# Altium PCB bme_affect_sen_brd.PcbDoc
Units mm, origin at the board's own origin, x right, y up, seen from the top; angles counter-clockwise.
Board outline 50 x 34 mm, 6 copper layers (L1_SIG/PWR, GND_P1, L3_SIG/PWR, L4_SIG/GND, GND_P2, L6_SIG/PWR), stack 0.816 mm thick; 116 components, 81 nets, 374 pads, 130 vias.
Unrouted connection lines stored in the file: 6.
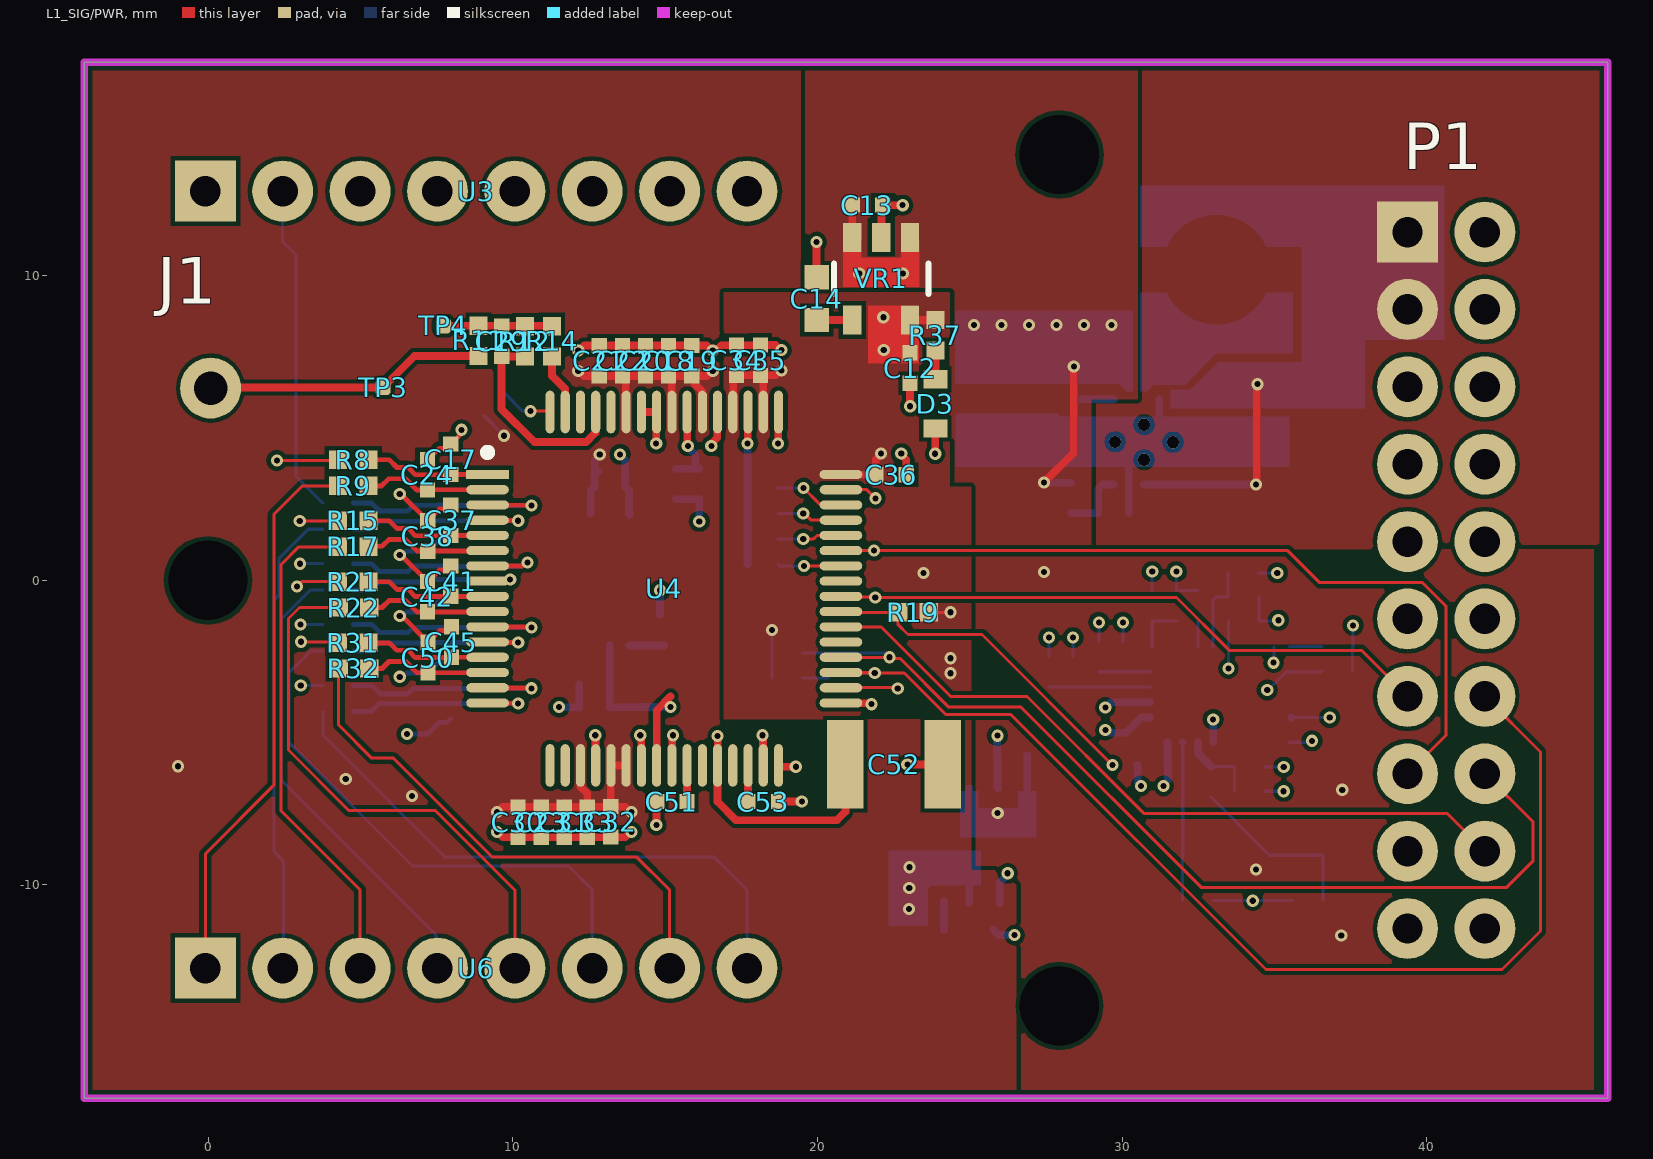
[diagram p0: L1_SIG/PWR view]
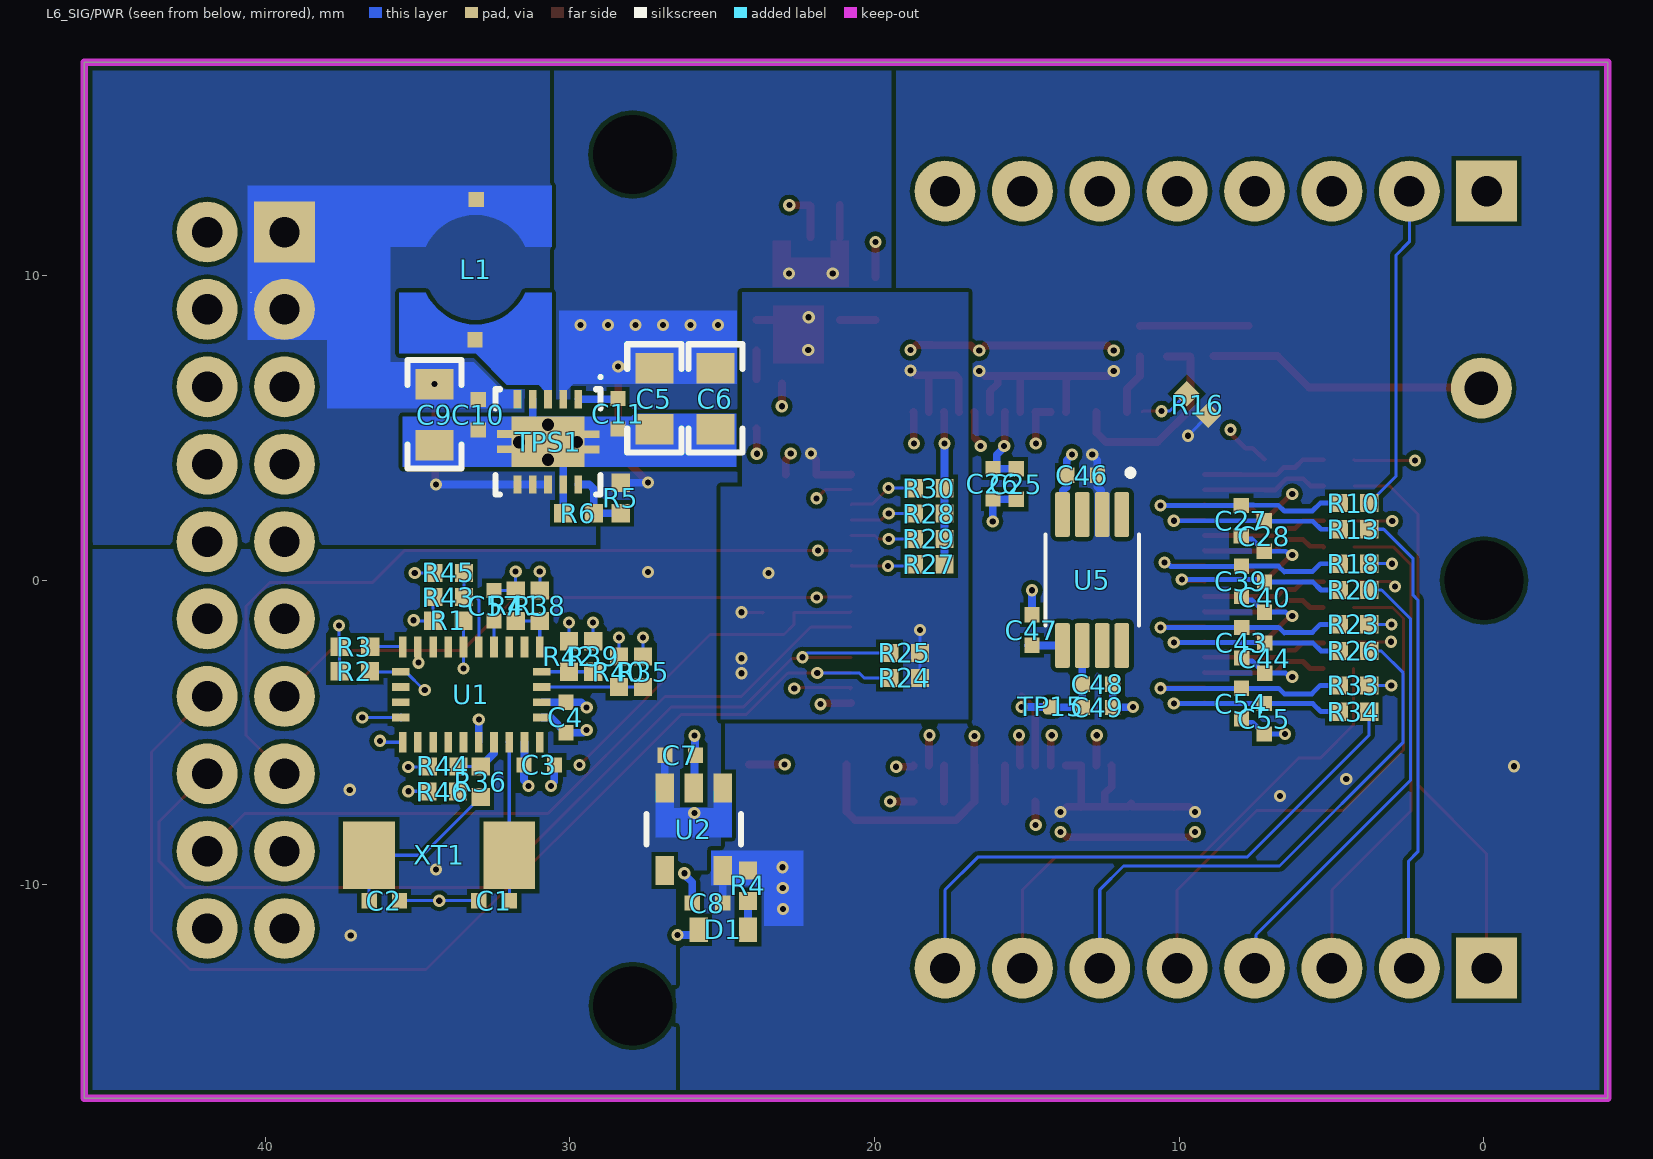
[diagram p1: L6_SIG/PWR view, seen from below]
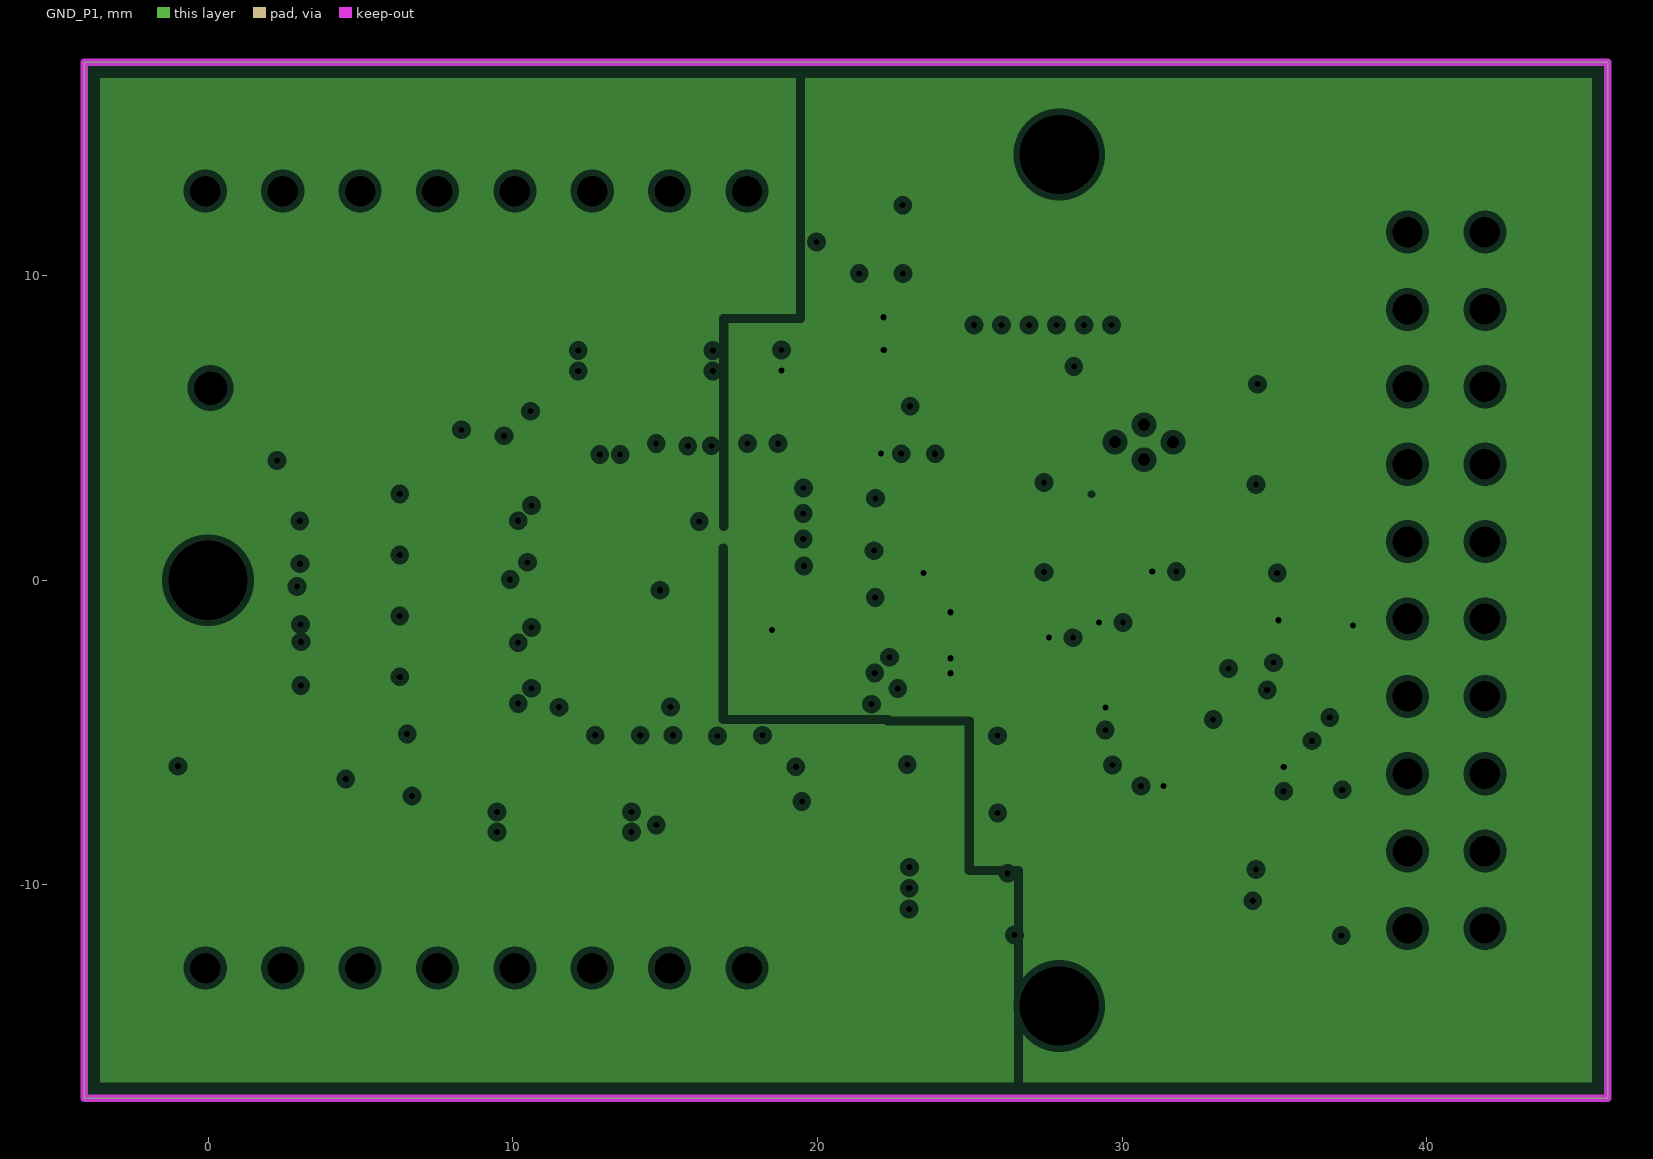
[diagram p2: GND_P1, clearances drawn from the general rule]
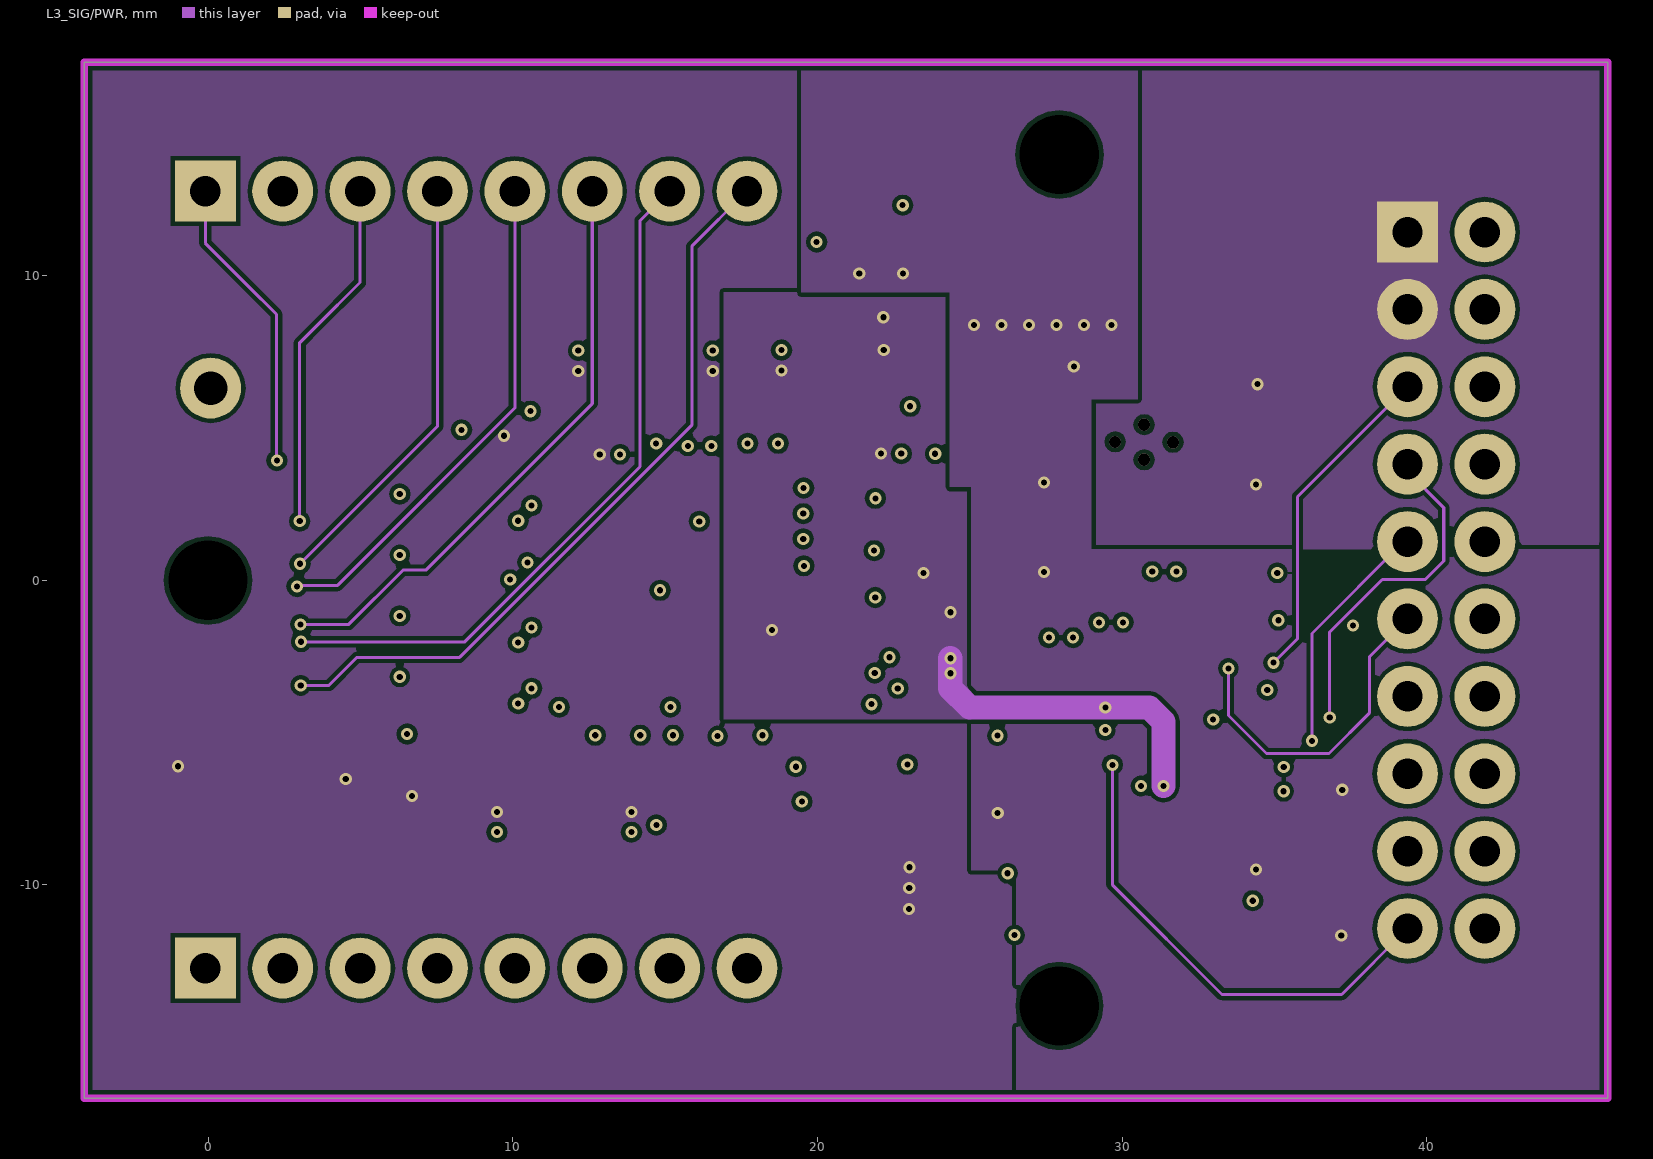
[diagram p3: L3_SIG/PWR]
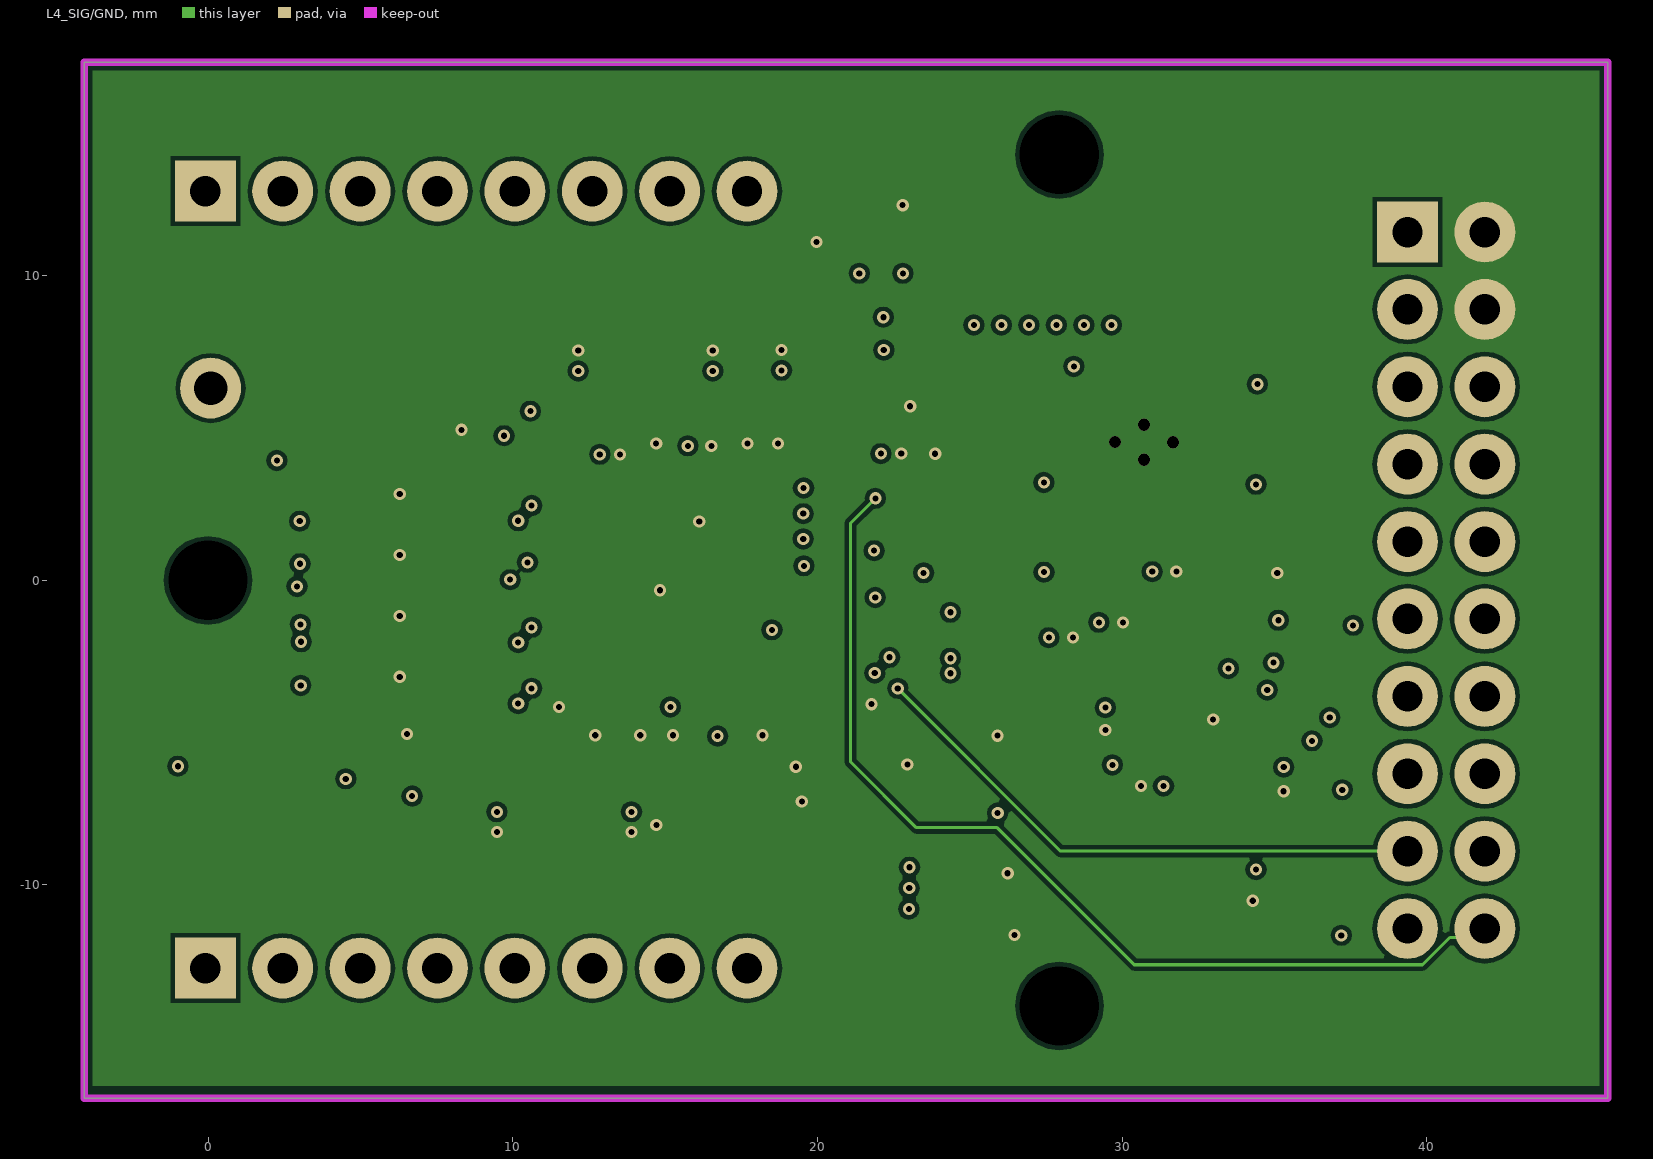
[diagram p4: L4_SIG/GND]
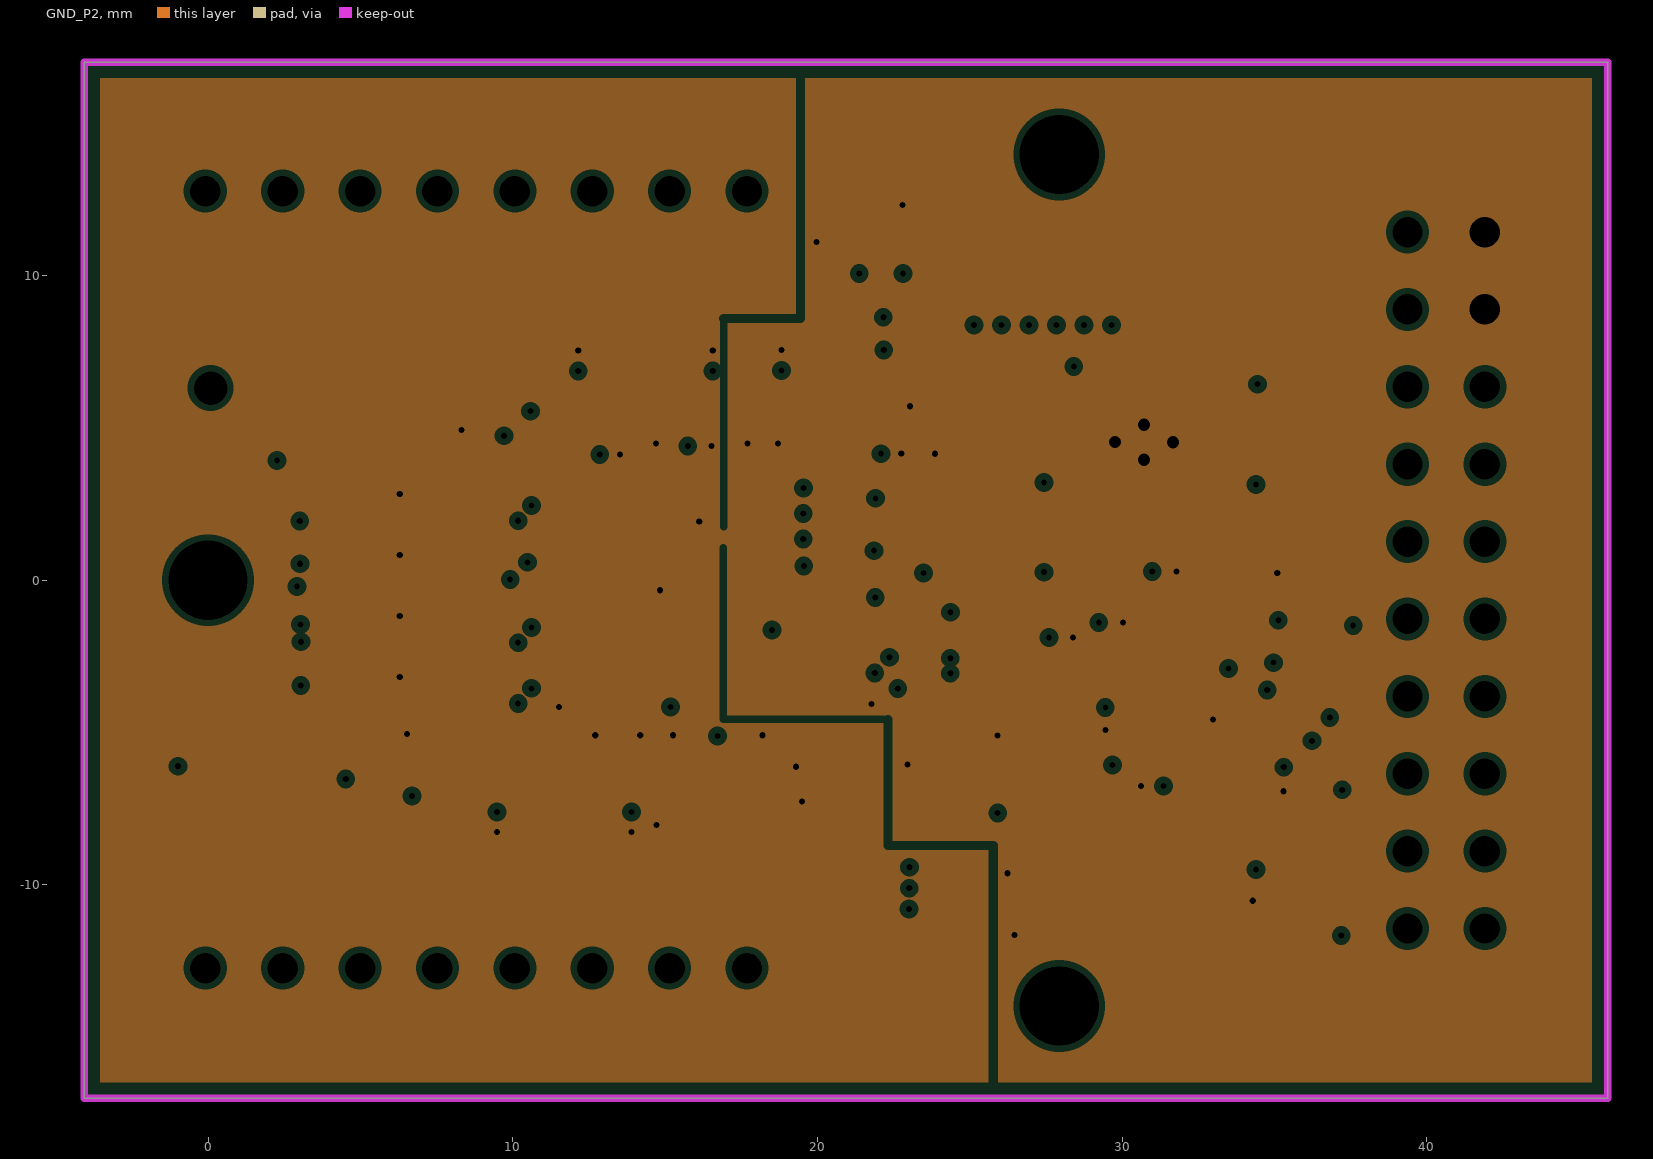
[diagram p5: GND_P2, clearances drawn from the general rule]
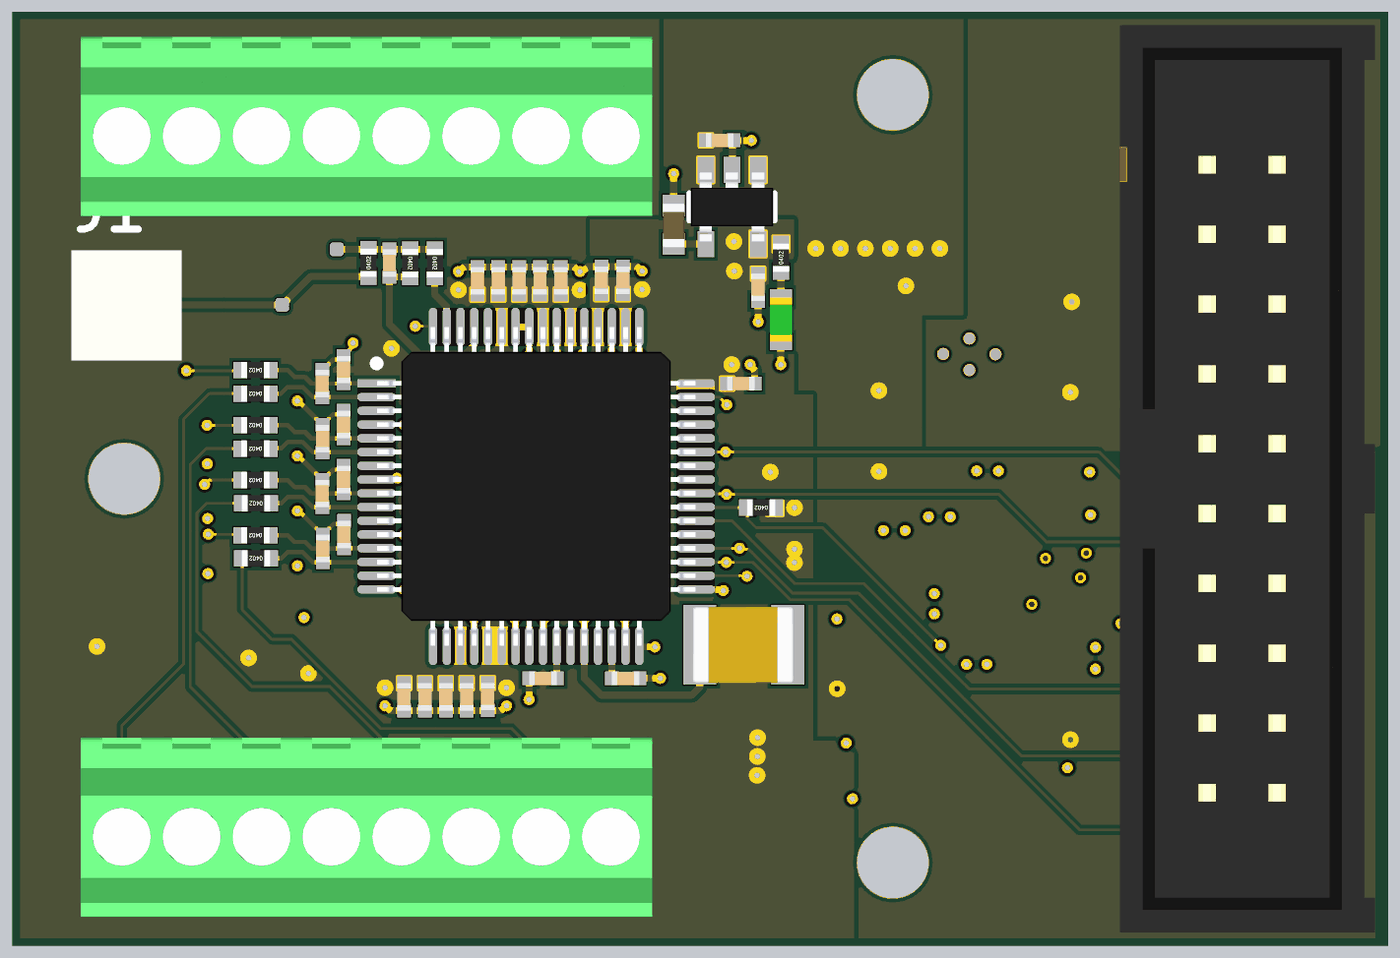
[diagram p6: 3D render of the assembled board from above, using the file's embedded part models]
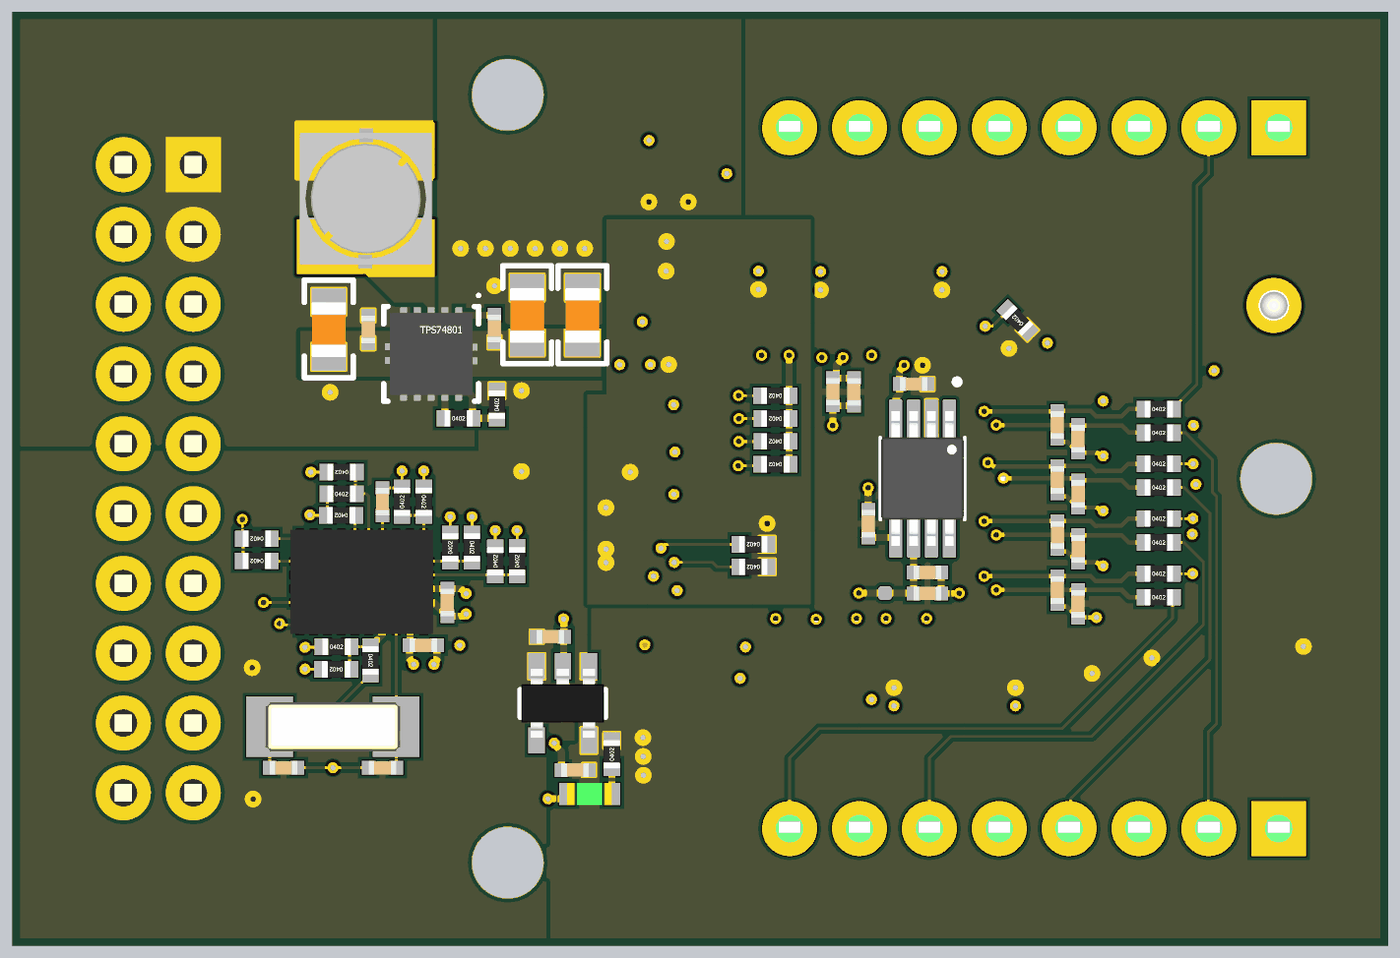
[diagram p7: 3D render of the assembled board from below, using the file's embedded part models]

## Layer stack, top to bottom
Top Solder: solder mask 0.01, Solder Resist, Dk 3.5
L1_SIG/PWR: signal copper 0.036
Dielectric 2: prepreg 0.071, PP-006, Dk 4.1
GND_P1: plane copper 0.035, net 3V3
Dielectric 4: prepreg 0.071, PP-006, Dk 4.1
L3_SIG/PWR: signal copper 0.035
Dielectric 1: dielectric 0.32, FR-4, Dk 4.8
L4_SIG/GND: signal copper 0.035
Dielectric 5: prepreg 0.071, PP-006, Dk 4.1
GND_P2: plane copper 0.035, net GND
Dielectric 3: prepreg 0.071, PP-006, Dk 4.1
L6_SIG/PWR: signal copper 0.036
Bottom Solder: solder mask 0.01, Solder Resist, Dk 3.5

## Board outline
-4.06,-17 45.94,-17 45.94,17 -4.06,17

## Design rules (kind name [scope] priority, off if disabled: settings)
Clearance [All] p1: gap=0.14 ignorepadtopadclearanceinfootprint=FALSE except(0.1: Arc-SMDPad Track-SMDPad; 0.127: SMDPad-SMDPad)
ComponentClearance [All] p1: gap=0.01 collisioncheckmode=3 verticalgap=0.254 showdistances=FALSE
PlaneClearance [All] p1: clearance=0.208
PlaneConnect [All] p1: planeconnectstyle=Direct reliefexpansion=0.508 reliefentries=4 reliefconductorwidth=0.254 reliefairgap=0.254
PolygonConnect [All] p1: connectstyle=Direct reliefconductorwidth=0.254 reliefentries=4 polygonreliefangle="90 Angle" airgapwidth=0.254
RoutingVias [All] p1: holewidth=0.2 width=0.4 viastyle="Through Hole" minholewidth=0.2 minwidth=0.4 maxholewidth=0.2 maxwidth=0.4
SolderMaskExpansion [All] p1: expansion=0.102 istentingtop=FALSE
Width [All] p1: maxlimit=0.8 minlimit=0.1 preferedwidth=0.254
27 further rules are at their usual default settings.

## Classes and differential pairs
component class U_pwr_sen_brd: C5 C6 C7 C8 C9 C10 C11 C12 C13 C14 D1 D3 L1 R4 R5 R6 R37 TPS1 U2 VR1
component class U_bno08x_module: C1 C2 C3 C4 C57 R1 R2 R3 R35 R36 R38 R39 R40 R41 R42 R43 R44 R45 R46 U1 XT1
component class U_ads1299: C17 C18 C19 C20 C21 C22 C23 C24 C25 C26 C27 C28 C29 C30 C31 C32 C33 C34 C35 C36 C37 C38 C39 C40 C41 C42 C43 C44 C45 C46 C47 C48 C49 C50 C51 C52 C53 C54 C55 J1 R8 R9 R10 R11 R12 R13 R14 R15 R16 R17 R18 R19 R20 R21 R22 R23 R24 R25 R26 R27 R28 R29 R30 R31 R32 R33 R34 TP3 TP4 TP15 U3 U4 U5 U6
component class bme_affect_sen_brd: P1

## Components (designator, comment, footprint, x,y, rotation, side; value= is the part's Value field where it differs from the comment)
C1 "0402 capacitor" "0402 CAP" 32.492,-10.518 r0 bottom value=0
C2 "0402 capacitor" "0402 CAP" 36.092,-10.518 r180 bottom value=0
C3 "0402 capacitor" "0402 CAP" 31.007,-6.061 r180 bottom value=0
C4 "0402 capacitor" "0402 CAP" 30.134,-4.502 r270 bottom value=0
C5 "0805, capacitor" "0805, cap" 27.231,4.953 r90 bottom value=10u
C6 "0805, capacitor" "0805, cap" 25.225,4.953 r90 bottom value=10u
C7 "0603, capacitor" "0402 CAP" 26.383,-5.745 r180 bottom value=0
C8 "0603, capacitor" "0402 CAP" 25.487,-10.595 r0 bottom value=0
C9 "0805, capacitor" "0805, cap" 34.444,4.436 r90 bottom value=10u
C10 "0603, capacitor" "0402 CAP" 33.009,5.434 r270 bottom value=0
C11 "0603, capacitor" "0402 CAP" 28.42,5.468 r270 bottom value=0
C12 "0603, capacitor" "0402 CAP" 23.041,6.966 r270 top value=2.2u
C13 "0603, capacitor" "0402 CAP" 21.643,12.314 r0 top value=100n
C14 "0603, capacitor" "0603 cap" 19.977,9.243 r90 top value=10n
C17 "0603, capacitor" "0402 CAP" 7.969,3.972 r90 top value=0
C18 "0603, capacitor" "0402 CAP" 15.114,7.204 r90 top value=100n
C19 "0603, capacitor" "0402 CAP" 15.874,7.204 r90 top value=1u
C20 "0603, capacitor" "0402 CAP" 14.358,7.204 r90 top value=100n
C21 "0603, capacitor" "0402 CAP" 12.843,7.204 r90 top value=1u
C22 "0603, capacitor" "0402 CAP" 13.601,7.204 r90 top value=100n
C23 "0603, capacitor" "0402 CAP" 10.935,-7.938 r270 top value=1u
C24 "0603, capacitor" "0402 CAP" 7.2,3.463 r90 top value=0
C25 "0603, capacitor" "0402 CAP" 15.356,3.159 r270 bottom value=1u
C26 "0603, capacitor" "0402 CAP" 16.118,3.167 r270 bottom value=100n
C27 "0603, capacitor" "0402 CAP" 7.966,1.953 r270 bottom value=0
C28 "0603, capacitor" "0402 CAP" 7.21,1.453 r270 bottom value=0
C29 "0603, capacitor" "0402 CAP" 9.641,7.85 r270 top value=0
C30 "0603, capacitor" "0402 CAP" 10.174,-7.938 r270 top value=100n
C31 "0603, capacitor" "0402 CAP" 11.691,-7.938 r270 top value=1u
C32 "0603, capacitor" "0402 CAP" 13.215,-7.928 r270 top value=100n
C33 "0603, capacitor" "0402 CAP" 12.447,-7.938 r270 top value=1u
C34 "0603, capacitor" "0402 CAP" 17.345,7.223 r90 top value=0
C35 "0603, capacitor" "0402 CAP" 18.131,7.223 r90 top value=0
C36 "0603, capacitor" "0402 CAP" 22.42,3.463 r0 top value=0
C37 "0603, capacitor" "0402 CAP" 7.969,1.972 r90 top value=0
C38 "0603, capacitor" "0402 CAP" 7.21,1.453 r90 top value=0
C39 "0603, capacitor" "0402 CAP" 7.96,-0.037 r270 bottom value=0
C40 "0603, capacitor" "0402 CAP" 7.204,-0.553 r270 bottom value=0
C41 "0603, capacitor" "0402 CAP" 7.969,-0.028 r90 top value=0
C42 "0603, capacitor" "0402 CAP" 7.2,-0.537 r90 top value=0
C43 "0603, capacitor" "0402 CAP" 7.95,-2.047 r270 bottom value=0
C44 "0603, capacitor" "0402 CAP" 7.198,-2.555 r270 bottom value=0
C45 "0603, capacitor" "0402 CAP" 7.989,-2.028 r90 top value=0
C46 "0603, capacitor" "0402 CAP" 13.185,3.446 r0 bottom value=4.7u
C47 "0603, capacitor" "0402 CAP" 14.836,-1.634 r90 bottom value=100n
C48 "0603, capacitor" "0402 CAP" 12.685,-3.412 r180 bottom value=1u
C49 "0603, capacitor" "0402 CAP" 12.685,-4.174 r180 bottom value=10u
C50 "0603, capacitor" "0402 CAP" 7.22,-2.537 r90 top value=0
C51 "0603, capacitor" "0402 CAP" 15.225,-7.263 r180 top value=1u
C52 "1210, capacitor" "1210, cap" 22.521,-6.044 r0 top value=100u
C53 "0603, capacitor" "0402 CAP" 18.225,-7.263 r0 top value=1u
C54 "0603, capacitor" "0402 CAP" 7.96,-4.047 r270 bottom value=0
C55 "0603, capacitor" "0402 CAP" 7.21,-4.547 r270 bottom value=0
C57 "0402 capacitor" "0402 CAP" 32.492,-0.839 r90 bottom value=0
D1 "0603, LED" "0603 LED" 24.086,-11.464 r0 bottom
D3 "0603, LED" "0603 LED" 23.871,6.666 r270 top
J1 "1x1 Mini binding post" 1_pin_binding_post 0.086,6.308 r90 top value="1x3 Pin Header"
L1 "Coil, SRR4028" SRR4028 33.099,10.196 r0 bottom locked value=2.2u
P1 "2x10 Ribbon Header" 2x10_RIBBON_CABLE_CON 40.64,0 r0 top locked value="1x10 Pin Header"
R1 "0402, resistor" "0402 res" 33.992,-1.332 r180 bottom value=0
R2 "0402, resistor" "0402 res" 37.061,-2.986 r180 bottom value=0
R3 "0402, resistor" "0402 res" 37.059,-2.181 r180 bottom value=0
R4 "0603, resistor" "0402 res" 24.154,-10.025 r270 bottom value=0
R5 "0603, resistor" "0402 res" 28.335,2.699 r270 bottom value=0
R6 "0603, resistor" "0402 res" 29.723,2.201 r0 bottom value=0
R8 "0603, resistor" "0402 res" 4.77,3.955 r0 top value=0
R9 "0603, resistor" "0402 res" 4.77,3.1 r0 top value=0
R10 "0603, resistor" "0402 res" 4.27,2.534 r0 bottom value=0
R11 "0603, resistor" "0402 res" 8.879,7.858 r270 top value=0
R12 "0603, resistor" "0402 res" 10.403,7.842 r90 top value=0
R13 "0603, resistor" "0402 res" 4.27,1.674 r0 bottom value=0
R14 "0603, resistor" "0402 res" 11.292,7.842 r90 top value=0
R15 "0603, resistor" "0402 res" 4.77,1.952 r0 top value=0
R16 "0603, resistor" "0402 res" 9.399,5.767 r225 bottom value=NC
R17 "0603, resistor" "0402 res" 4.77,1.096 r0 top value=0
R18 "0603, resistor" "0402 res" 4.27,0.543 r0 bottom value=0
R19 "0603, resistor" "0402 res" 23.153,-1.051 r0 top value=10k
R20 "0603, resistor" "0402 res" 4.27,-0.318 r0 bottom value=0
R21 "0603, resistor" "0402 res" 4.77,-0.047 r0 top value=0
R22 "0603, resistor" "0402 res" 4.789,-0.894 r0 top value=0
R23 "0603, resistor" "0402 res" 4.27,-1.448 r0 bottom value=0
R24 "0603, resistor" "0402 res" 19.01,-3.205 r180 bottom value=10k
R25 "0603, resistor" "0402 res" 19.012,-2.385 r180 bottom value=10k
R26 "0603, resistor" "0402 res" 4.27,-2.32 r0 bottom value=0
R27 "0603, resistor" "0402 res" 18.21,0.528 r0 bottom value=10k
R28 "0603, resistor" "0402 res" 18.207,2.188 r0 bottom value=10k
R29 "0603, resistor" "0402 res" 18.207,1.356 r0 bottom value=10k
R30 "0603, resistor" "0402 res" 18.21,3.021 r0 bottom value=10k
R31 "0603, resistor" "0402 res" 4.77,-2.054 r0 top value=0
R32 "0603, resistor" "0402 res" 4.789,-2.895 r0 top value=0
R33 "0603, resistor" "0402 res" 4.27,-3.452 r0 bottom value=0
R34 "0603, resistor" "0402 res" 4.27,-4.312 r0 bottom value=0
R35 "0402, resistor" "0402 res" 27.6,-3.001 r270 bottom value=0
R36 "0402, resistor" "0402 res" 32.928,-6.612 r90 bottom value=0
R37 "0603, resistor" "0402 res" 23.876,8.043 r270 top value=0
R38 "0402, resistor" "0402 res" 30.992,-0.835 r90 bottom value=0
R39 "0402, resistor" "0402 res" 29.239,-2.501 r90 bottom value=0
R40 "0402, resistor" "0402 res" 28.391,-3.002 r270 bottom value=0
R41 "0402, resistor" "0402 res" 31.782,-0.834 r270 bottom value=0
R42 "0402, resistor" "0402 res" 30.031,-2.502 r270 bottom value=0
R43 "0402, resistor" "0402 res" 33.977,-0.55 r0 bottom value=0
R44 "0402, resistor" "0402 res" 34.161,-6.112 r0 bottom value=0
R45 "0402, resistor" "0402 res" 33.977,0.242 r180 bottom value=0
R46 "0402, resistor" "0402 res" 34.176,-6.935 r180 bottom value=0
TP3 "Test Point" TESTPOINT_SMD 5.745,6.33 r180 top value="Test point"
TP4 "Test Point" TESTPOINT_SMD 7.728,8.35 r90 top value="Test point"
TP15 "Test Point" TESTPOINT_SMD 14.22,-4.158 r270 bottom value="Test point"
TPS1 "TPS6120x" PSON10N 30.723,4.545 r270 bottom value=TPS61200
U1 "BNO08X" LGA-28_2 33.244,-3.754 r270 bottom
U2 "TPS7A20" SOT23-5 25.937,-8.175 r270 bottom
U3 "1x8 Screw terminal" screw_term_8_pos 8.801,12.774 r0 top
U4 "ADS1299" TQFP64_05MM_P 14.975,-0.278 r0 top locked
U5 "REF5025ID" SOP65P490X110-8N 12.86,0.008 r270 bottom
U6 "1x8 Screw terminal" screw_term_8_pos 8.801,-12.73 r0 top
VR1 "TPS79333DBVR" SOT23-5 22.093,9.893 r270 top locked
XT1 "Crystal" ECS-.327-12.5-39-TR 34.292,-9.026 r0 bottom value="32.768 k"

## Footprints (in the part's own frame and the unit in brackets; to place one, negate y for a bottom-side part, rotate by r counter-clockwise, add the part's x,y. Pads: shape width x height; smd on the part's side, far side on the other; paste and mask are expansions set on the pad)
1_pin_binding_post [mm]
  round 2 hole 1.1: 1(0,0)
  body extent -2,-2 2,2, height 4.75
2x10_RIBBON_CABLE_CON [mm]
  rect 2x2 hole 1 mask+0: 1(-1.27,11.43)
  round 2 hole 1 mask+0: 2(-1.27,8.89) 3(-1.27,6.35) 4(-1.27,3.81) 5(-1.27,1.27) 6(-1.27,-1.27) 7(-1.27,-3.81) 8(-1.27,-6.35) 9(-1.27,-8.89) 10(-1.27,-11.43) 11(1.27,-11.43) 12(1.27,-8.89) 13(1.27,-6.35) 14(1.27,-3.81) 15(1.27,-1.27) 16(1.27,1.27) 17(1.27,3.81) 18(1.27,6.35) 19(1.27,8.89) 20(1.27,11.43)
  body extent -4.44,-16.51 4.83,16.51, height 8.89
"0402 CAP" [mm]
  rect 0.5x0.5 smd mask+0.05: 0(0.5,0) 1(-0.5,0)
  body extent -0.5,-0.25 0.5,0.25, height 0.5
"0402 res" [mm]
  rect 0.6x0.6 smd mask+0.05: 0(0.5,0) 1(-0.5,0)
  body extent -0.52,-0.3 0.52,0.3, height 0.34
"0603 cap" [mm]
  rect 0.8x0.8 smd mask+0.05: 0(0.7,0.002) 1(-0.7,0.002)
  body extent -0.83,-0.4 0.77,0.4, height 0.6
"0603 LED" [mm]
  rect 0.6x0.8 smd mask+0.05: 0(1.688,0.005) 1(0.067,0.005)
  body extent 0.07,-0.39 1.69,0.41, height 1.1
"0805, cap" [mm]
  rect 1x1.25 smd mask+0.05: 0(0,0) 1(2,0)
  silkscreen extent -0.76,-0.89 2.79,0.89, body extent -0.01,-0.62 1.99,0.63, height 0.8
"1210, cap" [mm]
  rect 1.2x2.9 smd mask+0.05: 0(1.6,0) 1(-1.6,0)
  body extent -1.87,-1.4 1.82,1.4, height 2.98
ECS-.327-12.5-39-TR [mm] "Crystal"
  rect 1.7x2.2 smd mask+0.05: 1(-2.3,0) 2(2.3,0)
  body extent -2.45,-0.9 2.45,0.9, height 1
LGA-28_2 [mm]
  rect 0.675x0.25 smd mask+0.05: 1(1.563,2.25) 6(-1.563,2.25) 7(-1.563,1.75) 8(-1.563,1.25) 9(-1.563,0.75) 10(-1.563,0.25) 11(-1.563,-0.25) 12(-1.563,-0.75) 13(-1.563,-1.25) 14(-1.563,-1.75) 15(-1.563,-2.25) 20(1.563,-2.25) 21(1.563,-1.75) 22(1.563,-1.25) 23(1.563,-0.75) 24(1.563,-0.25) 25(1.563,0.25) 26(1.563,0.75) 27(1.563,1.25) 28(1.563,1.75)
  rect 0.25x0.575 smd mask+0.05: 2(0.75,2.313) 3(0.25,2.313) 4(-0.25,2.313) 5(-0.75,2.313) 16(-0.75,-2.313) 17(-0.25,-2.313) 18(0.25,-2.313) 19(0.75,-2.313)
  body extent -1.9,-2.6 1.9,2.6, height 1.2
PSON10N [mm] "Pitch - 0.5 mm"
  rect 0.6x0.25 smd mask+0: 1(-1.4,1) 2(-1.4,0.5) 3(-1.4,0) 4(-1.4,-0.5) 5(-1.4,-1) 6(1.4,-1) 7(1.4,-0.5) 8(1.4,0) 9(1.4,0.5) 10(1.4,1)
  rect 0.25x0.6 smd mask+0: 11(-0.254,-1.372) 11(-0.248,1.384) 11(0.248,-1.372) 11(0.254,1.384)
  rect 1.65x2.4 smd mask+0: 11(0,0)
  silkscreen extent -2.17,-1.73 1.73,1.77, body extent -1.5,-1.5 1.5,1.5, height 1.05
screw_term_8_pos [mm]
  rect 2x2 hole 1 mask+0.05: 1(-8.89,0)
  round 2 hole 1 mask+0.05: 2(-6.35,0) 3(-3.81,0) 4(-1.27,0) 5(1.27,0) 6(3.81,0) 7(6.35,0) 8(8.89,0)
  body extent -10.39,-3.2 10.39,3.3, height 10
SOP65P490X110-8N [mm]
  rrect25% 1.47x0.48 smd mask+0.05: 1(-2.15,0.975) 2(-2.15,0.325) 3(-2.15,-0.325) 4(-2.15,-0.975) 5(2.15,-0.975) 6(2.15,-0.325) 7(2.15,0.325) 8(2.15,0.975)
  silkscreen extent -3.62,-1.54 1.5,1.53, body extent -2.45,-1.5 2.45,1.5, height 1.1
SOT23-5 [mm] "SOT23, 5-Leads, Body 2,90x2,80mm, Pitch 0,95mm, IPC Medium Density"
  rect 0.95x0.6 smd mask+0.05: 1(-1.35,0.95) 2(-1.35,0) 3(-1.35,-0.95) 4(1.35,-0.95) 5(1.35,0.95)
  silkscreen extent -0.5,-1.55 0.5,1.55, body extent -1.25,-1.5 1.25,1.5, height 1.1
SRR4028 [mm]
  rect 0.5x0.5 smd mask+0.05: 1(0.022,2.302) 2(-0.021,-2.302)
  L1_SIG/PWR region: -2.499,0.753 -1.636,0.753 -1.138,1.397 -0.406,1.755 0.408,1.754 1.139,1.395 1.637,0.751 1.637,0.751 2.5,0.751 2.5,2.75 -2.499,2.75
  L1_SIG/PWR region: 2.499,-0.753 1.636,-0.753 1.138,-1.397 0.406,-1.755 -0.408,-1.754 -1.139,-1.395 -1.637,-0.751 -1.637,-0.751 -2.5,-0.751 -2.5,-2.75 2.499,-2.75
  silkscreen extent 7.36,0.74 7.37,0.75, body extent -2.4,-2.4 2.4,2.4, height 2.7
TESTPOINT_SMD [mm] "Diameter 2mm, Hole 0.3mm"
  rrect50% 0.5x0.5 smd mask+0.05: 0(0,0)
TQFP64_05MM_P [mm] "TSQFP, 64-Leads, Body 10,20x10,20mm, Pitch 0,50mm, IPC Medium Density"
  rect 1.4x0.3 smd mask+0: 1(-5.8,3.75)
  oval 1.4x0.3 smd mask+0: 2(-5.8,3.25) 3(-5.8,2.75) 4(-5.8,2.25) 5(-5.8,1.75) 6(-5.8,1.25) 7(-5.8,0.75) 8(-5.8,0.25) 9(-5.8,-0.25) 10(-5.8,-0.75) 11(-5.8,-1.25) 12(-5.8,-1.75) 13(-5.8,-2.25) 14(-5.8,-2.75) 15(-5.8,-3.25) 16(-5.8,-3.75) 33(5.8,-3.75) 34(5.8,-3.25) 35(5.8,-2.75) 36(5.8,-2.25) 37(5.8,-1.75) 38(5.8,-1.25) 39(5.8,-0.75) 40(5.8,-0.25) 41(5.8,0.25) 42(5.8,0.75) 43(5.8,1.25) 44(5.8,1.75) 45(5.8,2.25) 46(5.8,2.75) 47(5.8,3.25) 48(5.8,3.75)
  oval 0.3x1.4 smd mask+0: 17(-3.75,-5.8) 18(-3.25,-5.8) 19(-2.75,-5.8) 20(-2.25,-5.8) 21(-1.75,-5.8) 22(-1.25,-5.8) 23(-0.75,-5.8) 24(-0.25,-5.8) 25(0.25,-5.8) 26(0.75,-5.8) 27(1.25,-5.8) 28(1.75,-5.8) 29(2.25,-5.8) 30(2.75,-5.8) 31(3.25,-5.8) 32(3.75,-5.8) 49(3.75,5.8) 50(3.25,5.8) 51(2.75,5.8) 52(2.25,5.8) 53(1.75,5.8) 54(1.25,5.8) 55(0.75,5.8) 56(0.25,5.8) 57(-0.25,5.8) 58(-0.75,5.8) 59(-1.25,5.8) 60(-1.75,5.8) 61(-2.25,5.8) 62(-2.75,5.8) 63(-3.25,5.8) 64(-3.75,5.8)
  silkscreen extent -5.92,4.35 -5.68,4.6, body extent -5.79,-5.79 5.79,5.79, height 1

## Part data
J1: "1 Pin Binding Post M2.5 Through Hole"
L1: "2,2µH, 2.0 A, 28 mOhm", DigiKey=SRR4028-2R2YCT-ND
P1: "2.54 mm"
TPS1: "TPS6120x Low Input Voltage Synchronous Boost Converter", DigiKey=296-27017-1-ND
U1: "9-axis IMU"
U2: "5V and 300-mA, Ultra-Low-Noise, Low-IQ, High PSRR LDO", Order number=296-TPS7A2050PDBVRCT-ND, Supplier=Digikey
U4: "24-Bit, Analog-to-Digital Converter for EEG and / Biopotential Measurements"
VR1: "Low Dropout Regulators(LDO) Positive Fixed 180mV @ 200mA 5.5V 3.3V 200mA SOT-23-5 RoHS", Case/Package=SOT-23, Current Rating=200mA, Dropout Voltage=102mV, Input Bias Current=170uA, Manufacturer="Texas Instruments", Max Input Voltage=5.5V, Max Operating Temperature=125°C, Max Output Voltage=3.3V, Max Power Dissipation=560mW, Min Current Limit=285mA, Min Input Voltage=2.7V, Min Operating Temperature=-40°C, Output Voltage Accuracy=2%, Package Quantity=1, Quiescent Current=200uA, Supplier Part Number 1=595-TPS79333DBVR, Accuracy=2%, Category="Voltage Regulators - Linear", ComponentLink1Description=https://datasheet.ciiva.com/34302/1123416-34302001.pdf?src-supplier=Jameco, ComponentLink1URL=https://datasheet.ciiva.com/34302/1123416-34302001.pdf?src-supplier=Jameco, ComponentLink2Description=https://datasheet.ciiva.com/22734/1828169-22734577.pdf?src-supplier=Farnell, ComponentLink2URL=https://datasheet.ciiva.com/22734/1828169-22734577.pdf?src-supplier=Farnell, Height=1.15mm, Lead Free="Lead Free", Length=2.9mm, Manufacturer Part Number=TPS79333DBVR, Max Output Current=200mA, Max Supply Voltage=5.5V, Min Output Voltage=3.3V, Min Supply Voltage=2.7V, Nominal Output Voltage=3.3V, Number of Outputs=1, Number of Pins=5, Number of Regulators=1, Output Current=200mA, Output Type=Fixed, Output Voltage=3.3V, Packaging="Tape and Reel", Polarity=Positive, Power Dissipation=560mW, Power Rating=560mW, Pricing 1="1=0,94000, 10=0,81900, 50=0,81900, 100=0,62800, 250=0,58300, 500=0,49700, 1000=0,39700, 3000=0,36000, 10000=0,36000 (USD)", Radiation Hardening=No, REACH SVHC="No SVHC", RoHS=Yes, RoHS Compliant=Yes, Supplier 1=Mouser, Termination=SMD/SMT, Width=1.6mm
C52: Order number=587-1965-1-ND, Supplier=Digikey
TP3 TP4 TP15: Farnell=1702006
U3 U6: Order number=A98338-ND, Supplier=Digikey
U5: Farnell=1702829

## Free pads (board coordinates)
  round 1.524 hole 2.6 mask+0.05: 2(0,0) 2(27.94,-13.97) 2(27.94,13.97)

## Via types
v1: diameter 0.4, hole 0.2, L1_SIG/PWR to L6_SIG/PWR, 126 vias
v2: diameter 0.4, hole 0.4, L1_SIG/PWR to L6_SIG/PWR, 4 vias

## Nets (pads, with @x,y where several pads share a name; then routed paths per layer and width w, separated by ;. In a path a pad name is that pad's centre, name@x,y a point inside that pad or via, vN(x,y) a via of type N, cw(c..) or ccw(c..) an arc to the next point about the centre after c; other vN are vias at no path point)
3V3: C3.1 C4.1 C12.1 C34.1 C35.1 C36.1 R1.1 R2.1 R3.1 R19.0 R24.0 R25.0 R35.1 R37.1 R38.0 R39.0 R43.0 R44.0 U1.3 U1.28 U4.48 U4.50 U4.52 VR1.5 | length 30.3
  L1_SIG/PWR w0.1: R19.0@23.672,-1.069 R19.0 v1(24.368,-1.051)
  L1_SIG/PWR w0.25: U4.52 17.234,5.531 17.234,6.612 C34.1 ; C34.1@17.339,6.717 C34.1 ; C35.1 C35.1@18.222,6.723 ; U4.50 18.222,5.524 C35.1@18.222,6.723 ; v1(18.823,6.888) 18.822,6.889 18.792,6.889 18.625,6.723 C35.1@18.222,6.723 ; U4.48 20.784,3.463 C36.1 21.92,3.957 v1@22.086,4.124 ; C34.1 C35.1@18.222,6.723
  L1_SIG/PWR w0.254: C12.1 VR1.5@23.041,8.541 ; C12.1@23.043,7.473 VR1.5 R37.1
  L3_SIG/PWR w0.8: v1(24.365,-2.559) 24.365,-3.542 25.001,-4.178 v1(29.451,-4.178) 30.892,-4.178 31.361,-4.647 v1(31.361,-6.753)
  L6_SIG/PWR w0.1: R24.0 v1(18.51,-1.629) ; R35.1 v1(27.6,-1.882) ; R39.0 v1(29.239,-1.382) ; R38.0@30.99,-0.333 v1(30.99,0.285) ; R43.0 34.492,-0.564 R1.1 35.11,-1.332 v1(35.129,-1.312) ; R44.0@34.689,-6.134 v1(35.308,-6.134) ; R2.1 R3.1 37.586,-2.156 v1(37.586,-1.482)
  L6_SIG/PWR w0.254: v1(29.451,-4.178) 29.466,-4.178 29.639,-4.005 C4.1@30.134,-4.005 ; C4.1 U1.3@30.929,-4.002 ; v1@31.339,-6.735 31.341,-6.733 31.512,-6.562 C3.1@31.512,-6.069 ; U1.28@31.492,-5.315 U1.28 31.494,-6.048 C3.1 C3.1@31.515,-6.069
  other v1: 24.365,-3.051 23.488,0.242 22.086,4.156 22.181,7.556 22.165,8.633
5V5: C5.1 C6.1 C7.1 C13.1 R5.1 TPS1.2 U2.1 U2.3 VR1.1 VR1.3 | length 10.9
  L1_SIG/PWR w0.254: VR1.3 C13.1 ; v1(27.436,3.208) 28.418,4.19 v1(28.418,7.018)
  L6_SIG/PWR w0.254: U2.1 24.987,-7.597 25.179,-7.789 26.695,-7.789 26.887,-7.597 U2.3 26.885,-6.823 26.885,-5.747 C7.1 ; v1@27.44,3.203 28.33,3.203 R5.1 ; v1(28.418,7.018) v1@28.425,7.018
  other v1: 37.196,-11.657 34.398,-9.495 25.918,-7.64 37.229,-6.878 27.439,0.266 25.139,8.379 26.041,8.379 26.944,8.379 27.846,8.379 28.748,8.379 29.651,8.379 21.375,10.072 22.807,10.072
5V_A: C8.1 C18.1 C19.1 C20.1 C21.1 C22.1 C23.1 C30.1 C31.1 C32.1 C33.1 C46.1 R4.1 R16.0 U2.5 U4.19 U4.21 U4.22 U4.54 U4.56 U4.59 U5.2 | length 21.2
  L1_SIG/PWR w0.25: v1@9.513,-7.605 9.679,-7.438 C30.1 ; C30.1@10.161,-7.452 C30.1 ; C23.1@10.932,-7.438 C30.1 ; C23.1 C31.1@11.565,-7.438 ; C31.1@11.573,-7.321 C31.1 ; C31.1 C33.1 ; v1@12.182,6.87 12.349,6.704 C21.1 C22.1 ; U4.19 12.219,-6.084 12.219,-6.772 12.442,-6.994 12.442,-7.432 C33.1 ; C32.1@13.219,-7.452 C32.1@13.205,-7.438 ; U4.21@13.225,-6.097 13.244,-6.078 U4.22 ; U4.21 13.215,-6.088 C32.1 C32.1@13.205,-7.438 ; U4.59 13.715,5.531 13.715,6.59 C22.1 ; v1@13.866,-7.605 13.7,-7.438 C32.1@13.205,-7.438 ; C20.1 C22.1 ; C20.1@14.36,6.704 C18.1 ; C18.1@15.117,6.701 15.215,6.602 15.215,5.531 U4.56 ; C18.1@15.117,6.704 C19.1 ; C19.1@15.888,6.717 C19.1 ; U4.54 16.215,5.531 16.215,6.197 15.959,6.453 15.959,6.62 C19.1 ; v1@16.535,6.87 16.369,6.704 C19.1 ; C33.1 C32.1@13.205,-7.438
  L6_SIG/PWR w0.1: R16.0 v1(9.715,4.744)
  L6_SIG/PWR w0.25: C46.1 C46.1@12.81,3.571 ; C46.1@12.693,3.529 12.693,3.932 12.859,4.099 12.859,4.129 v1(12.858,4.13)
  L6_SIG/PWR w0.254: U5.2@12.558,2.181 12.558,2.946 12.685,3.073 C46.1 ; R4.1 U2.5 C8.1
  other v1: 23.006,-10.791 23.015,-10.105 23.023,-9.42 9.481,-7.603 13.898,-7.603 6.697,-7.083 4.521,-6.52 -0.989,-6.103 12.151,6.869 16.567,6.869
ADS_C\S\: P1.10 R19.1 U4.39 | length 27.2
  L1_SIG/PWR w0.1: U4.39 20.797,-1.051 R19.1 22.653,-1.462 22.974,-1.783 25.404,-1.783 v1(29.683,-6.062)
  L3_SIG/PWR w0.1: v1(29.683,-6.062) 29.683,-9.993 33.283,-13.593 37.207,-13.593 P1.10
ADS_MISO: P1.8 U4.43 | length 26.7
  L1_SIG/PWR w0.1: U4.43@20.793,0.954 U4.43 v1(21.862,0.972) 35.436,0.972 36.488,-0.08 39.863,-0.08 40.632,-0.849 40.632,-5.088 P1.8
ADS_MOSI: P1.9 U4.34 | length 20.9
  L1_SIG/PWR w0.1: U4.34@20.8,-3.566 20.761,-3.527 v1@22.617,-3.527
  L4_SIG/GND w0.1: v1(22.639,-3.549) 27.98,-8.89 P1.9
ADS_SCK: P1.7 U4.40 | length 20
  L1_SIG/PWR w0.1: U4.40 20.793,-0.547 21.88,-0.547 v1(21.899,-0.565) 31.787,-0.565 33.523,-2.301 37.861,-2.301 P1.7
BNO2_NRST: P1.6 R1.0 U1.11 | length 12.4
  L3_SIG/PWR w0.1: v1(33.492,-2.896) 33.492,-4.44 34.74,-5.688 36.793,-5.688 38.119,-4.362 38.119,-2.521 P1.6
  L6_SIG/PWR w0.1: v1(33.492,-2.896) R1.0
CLKSEL0: R43.1 R45.0 U1.10 | length 2.9
  L6_SIG/PWR w0.1: U1.10@32.992,-2.189 32.992,-0.644 33.086,-0.55 R43.1 ; R43.1 R45.0
CLKSEL1: R36.0 R44.1 R46.0 U1.26 | length 2.5
  L6_SIG/PWR w0.1: R36.0 R44.1 33.685,-6.136 33.685,-6.926 R46.0
  L6_SIG/PWR w0.254: U1.26@32.492,-5.315 U1.26 32.494,-5.677 R36.0
DRDY_ADS: P1.11 U4.47 | length 34.3
  L1_SIG/PWR w0.1: U4.47 21.624,2.972 v1(21.906,2.69)
  L4_SIG/GND w0.1: v1(21.906,2.69) 21.088,1.872 21.088,-5.958 23.25,-8.12 25.9,-8.12 30.4,-12.62 39.863,-12.62 40.76,-11.723 41.617,-11.723 P1.11
GND: C1.0 C2.0 C3.0 C4.0 C5.0 C6.0 C7.0 C8.0 C9.0 C10.0 C11.0 C12.0 C13.0 C14.0 C17.0 C18.0 C19.0 C20.0 C21.0 C22.0 C23.0 C24.0 C25.0 C26.0 C27.0 C28.0 C30.0 C31.0 C32.0 C33.0 C34.0 C35.0 C36.0 C37.0 C38.0 C39.0 C40.0 C41.0 C42.0 C43.0 C44.0 C45.0 C46.0 C47.0 C48.0 C49.0 C50.0 C51.0 C52.0 C53.0 C54.0 C55.0 C57.0 D1.0 D3.0 P1.19 P1.20 R6.0 R27.1 R28.1 R29.1 R30.1 R40.1 R41.1 R42.1 R45.1 R46.1 TPS1.4 TPS1.9 TPS1.11 U1.2 U1.25 U2.2 U4.20 U4.23 U4.25 U4.31 U4.32 U4.33 U4.49 U4.51 U4.53 U4.57 U4.58 U5.4 VR1.2 | length 72.5
  L1_SIG/PWR w0.16: v1(6.294,-1.17) 6.352,-1.17 C50.0 ; v1(6.294,0.83) 6.332,0.83 C42.0 ; v1(6.294,2.83) 6.332,2.83 C38.0 7.603,2.347 7.843,2.347 C37.0@7.96,2.463 ; C38.0@7.208,1.953 C38.0@7.211,1.95 ; C24.0@7.21,3.973 7.37,4.133 7.39,4.133 7.589,4.332 7.829,4.332 C17.0@7.96,4.463 ; C42.0@7.212,-0.047 7.22,-0.047 7.598,0.332 7.838,0.332 C41.0@7.96,0.453 ; C50.0@7.216,-2.027 7.219,-2.03 7.227,-2.03 7.605,-1.651 7.845,-1.651 C45.0@7.967,-1.53 ; C17.0 8.273,4.776 8.273,4.893 v1(8.319,4.939)
  L1_SIG/PWR w0.25: v1(9.481,-8.265) 9.506,-8.265 9.679,-8.438 C30.0 C23.0@10.932,-8.438 ; C23.0 11.689,-8.438 C33.0 13.7,-8.438 13.873,-8.265 v1(13.898,-8.265) ; v1@12.182,7.537 12.349,7.704 C21.0 C22.0 C20.0@14.359,7.704 ; v1(12.71,-5.087) 12.717,-5.095 12.717,-6.071 U4.20 ; v1(14.188,-5.087) 14.215,-5.115 14.215,-6.069 U4.23 ; U4.58 U4.57 14.717,5.514 14.717,4.54 14.71,4.533 v1(14.71,4.493) ; C20.0@14.36,7.704 C18.0 ; C18.0@15.117,7.704 C19.0 16.369,7.704 v1@16.535,7.537 ; U4.25 15.234,-6.069 15.234,-5.115 v1(15.262,-5.087) ; v1(16.52,4.412) 16.52,4.48 16.715,4.674 16.715,5.512 U4.53 ; v1@16.678,7.55 16.844,7.717 17.339,7.717 17.342,7.72 18.128,7.72 C35.0 18.625,7.723 v1@18.792,7.556 ; v1@17.71,4.533 17.717,4.54 17.717,5.514 U4.51 ; v1@18.2,-5.107 18.215,-5.123 18.215,-6.069 U4.31 ; v1@18.71,4.533 18.717,4.54 18.717,5.514 U4.49 ; U4.32 18.725,-6.097 18.748,-6.12 v1(19.293,-6.12) ; v1@22.753,4.124 22.92,3.957 C36.0 C36.0@22.906,3.476
  L1_SIG/PWR w0.254: v1(14.714,-8.033) 14.719,-8.028 14.719,-7.269 C51.0 ; C53.0 v1(19.491,-7.263) ; C14.0 v1(19.975,11.102) ; U4.33 20.783,-4.037 21.748,-4.037 v1(21.779,-4.068) ; VR1.2@22.106,11.257 C13.0@22.106,12.282 ; C13.0@22.134,12.31 v1(22.801,12.311) ; v1(22.953,-6.044) C52.0 ; v1@23.044,5.714 C12.0@23.044,6.458 ; v1(23.867,4.152) 23.867,4.97 D3.0
  L6_SIG/PWR w0.1: R40.1 v1(28.391,-1.884) ; R42.1 v1(30.031,-1.384) ; v1(31.782,0.284) R41.1 32.495,-0.334 C57.0@32.5,-0.339 ; C1.0 v1(34.292,-10.518) C2.0 ; R45.1 v1(35.096,0.242) ; R46.1@34.688,-6.925 v1(35.306,-6.925)
  L6_SIG/PWR w0.16: v1(6.294,-3.17) 6.386,-3.17 6.509,-3.047 7.21,-3.047 7.606,-2.651 7.856,-2.651 C43.0@7.962,-2.545 ; v1(6.294,-1.17) 6.386,-1.17 6.509,-1.047 7.21,-1.047 7.606,-0.651 7.856,-0.651 C39.0@7.962,-0.545 ; v1(6.294,0.83) 6.386,0.83 6.509,0.953 C28.0 7.606,1.349 7.856,1.349 C27.0@7.962,1.455 ; v1(6.536,-5.047) C55.0 7.598,-4.658 7.848,-4.658 C54.0
  L6_SIG/PWR w0.25: v1(11.521,-4.164) 11.526,-4.169 12.18,-4.169 C49.0 ; v1@13.527,4.099 13.693,3.932 C46.0@13.693,3.438 ; C46.0@13.685,3.253 C46.0
  L6_SIG/PWR w0.254: C49.0 C48.0 ; C46.0 13.693,3.438 13.693,3.065 13.82,2.938 13.82,2.173 U5.4 ; C47.0 v1@14.836,-0.329 ; C25.0 16.118,2.659 16.124,2.653 v1(16.124,1.932) ; R27.1 R30.1 v1(17.71,4.493) ; D1.0 25.774,-11.472 25.947,-11.645 v1(26.472,-11.645) ; v1(25.909,-5.102) 25.898,-5.112 25.898,-5.729 25.882,-5.745 25.91,-5.772 25.91,-6.798 U2.2 ; C8.0 25.987,-9.917 26.247,-9.657 v1(26.247,-9.618) ; v1(29.451,-4.918) 29.49,-4.918 29.574,-5.002 C4.0 30.632,-4.504 U1.2@30.927,-4.504 ; v2(29.773,4.542) 30.223,4.092 TPS1.9 ; R6.0 TPS1.9 ; C3.0 30.515,-6.069 30.515,-6.607 30.621,-6.713 v1(30.621,-6.753) ; TPS1.11@30.723,4.546 31.223,5.046 TPS1.4 ; U1.25@32.992,-5.315 v1(32.992,-4.566)
  other v1: 18.2,-5.087 14.836,-0.329 13.527,4.13 22.755,4.156 18.71,4.493 23.047,5.711 12.151,7.537 16.567,7.537 18.823,7.556
  other v2: 30.723,3.955 31.673,4.53 30.723,5.105
GPIO1: R27.0 U4.42 | length 2.1
  L1_SIG/PWR w0.1: v1(19.557,0.471) U4.42 ; U4.42@20.747,0.5 U4.42
  L6_SIG/PWR w0.1: R27.0 18.766,0.471 v1(19.557,0.471)
GPIO2: R29.0 U4.44 | length 2.1
  L1_SIG/PWR w0.1: v1(19.536,1.356) 19.539,1.359 19.878,1.359 19.991,1.472 U4.44
  L6_SIG/PWR w0.1: R29.0 v1(19.536,1.356)
GPIO3: R28.0 U4.45 | length 2.2
  L1_SIG/PWR w0.1: v1(19.536,2.188) 19.579,2.188 19.795,1.972 U4.45
  L6_SIG/PWR w0.1: R28.0 v1(19.536,2.188)
GPIO4: R30.0 U4.46 | length 2.3
  L1_SIG/PWR w0.1: v1(19.547,3.028) 20.064,2.51 20.736,2.51 U4.46
  L6_SIG/PWR w0.1: R30.0 18.717,3.028 v1(19.547,3.028)
IN_N1: R9.1 U6.1 | length 18.3
  L1_SIG/PWR w0.1: U6.1 -0.089,-8.983 2.161,-6.733 2.161,2.161 3.1,3.1 R9.1
IN_N2: R13.1 U6.2 | length 15.5
  L6_SIG/PWR w0.1: U6.2 2.471,-12.71 2.471,-9.214 2.171,-8.913 2.171,-0.648 2.324,-0.495 2.324,0.706 3.292,1.674 R13.1
IN_N3: R17.1 U6.3 | length 16.4
  L1_SIG/PWR w0.1: R17.1 2.979,1.096 2.401,0.518 2.401,-7.572 4.991,-10.163 U6.3
IN_N4: R20.1 U6.4 | length 15.3
  L6_SIG/PWR w0.1: R20.1 3.358,-0.318 2.413,-1.263 2.413,-6.568 7.484,-11.639 7.484,-12.683 U6.4
IN_N5: R22.1 U6.5 | length 18
  L1_SIG/PWR w0.1: R22.1 2.999,-0.894 2.641,-1.252 2.641,-5.571 4.63,-7.56 7.467,-7.56 10.071,-10.164 U6.5
IN_N6: R26.1 U6.6 | length 18.2
  L6_SIG/PWR w0.1: R26.1 3.371,-2.32 2.653,-3.039 2.653,-5.319 6.714,-9.38 11.829,-9.38 12.611,-10.163 U6.6
IN_N7: R32.1 U6.7 | length 17.5
  L1_SIG/PWR w0.1: R32.1 4.289,-4.753 5.375,-5.839 6.086,-5.839 9.335,-9.088 14.077,-9.088 15.14,-10.151 15.14,-12.719 U6.7
IN_N8: R34.1 U6.8 | length 19.4
  L6_SIG/PWR w0.1: R34.1 3.77,-5.081 7.776,-9.088 16.617,-9.088 17.691,-10.163 U6.8
IN_P1: R8.1 U3.1 | length 11.8
  L1_SIG/PWR w0.1: v1(2.261,3.931) 4.245,3.931 R8.1
  L3_SIG/PWR w0.1: U3.1 -0.089,11.063 1.288,9.686 2.245,8.729 2.245,3.931 v1(2.261,3.931)
IN_P2: R10.1 U3.2 | length 10.8
  L6_SIG/PWR w0.1: U3.2 2.451,11.107 2.88,10.678 2.88,3.423 R10.1
IN_P3: R15.1 U3.3 | length 12.9
  L1_SIG/PWR w0.1: v1(3.01,1.943) 4.261,1.943 R15.1
  L3_SIG/PWR w0.1: v1(3.01,1.943) 3.01,7.795 3.552,8.338 4.991,9.776 U3.3
IN_P4: R18.1 U3.4 | length 14.8
  L3_SIG/PWR w0.1: v1(3.019,0.543) 7.531,5.055 U3.4
  L6_SIG/PWR w0.1: v1(3.019,0.543) R18.1
IN_P5: R21.1 U3.5 | length 18.3
  L1_SIG/PWR w0.1: v1(2.921,-0.203) 3.077,-0.047 R21.1 R21.1@4.152,-0.165
  L3_SIG/PWR w0.1: v1(2.921,-0.203) 2.959,-0.165 4.255,-0.165 10.071,5.651 U3.5
IN_P6: R23.1 U3.6 | length 20.3
  L3_SIG/PWR w0.1: v1(3.031,-1.448) 4.621,-1.448 6.401,0.332 7.146,0.332 12.611,5.796 U3.6
  L6_SIG/PWR w0.1: v1(3.031,-1.448) R23.1
IN_P7: R31.1 U3.7 | length 24.2
  L1_SIG/PWR w0.1: v1(3.055,-2.019) 4.234,-2.019 R31.1
  L3_SIG/PWR w0.1: v1(3.055,-2.019) 8.429,-2.019 14.177,3.729 14.177,11.8 U3.7
IN_P8: R33.1 U3.8 | length 25.5
  L3_SIG/PWR w0.1: v1(3.043,-3.452) 3.967,-3.452 4.891,-2.528 8.259,-2.528 15.879,5.091 15.879,10.961 U3.8
  L6_SIG/PWR w0.1: v1(3.043,-3.452) R33.1
INT_BNO2: P1.3 U1.14 | length 11.4
  L3_SIG/PWR w0.1: v1(34.973,-2.706) 35.757,-1.922 35.757,2.737 P1.3
  L6_SIG/PWR w0.1: v1(34.973,-2.706) 34.992,-2.688 U1.14@34.992,-2.189
NetC1_1: C1.1 U1.27 XT1.1 | length 5.2
  L6_SIG/PWR w0.1: C1.1 XT1.1 31.994,-9.024 U1.27
  L6_SIG/PWR w0.254: U1.27 U1.27@31.992,-5.315
NetC2_1: C2.1 R36.1 XT1.2 | length 5.9
  L6_SIG/PWR w0.1: R36.1 34.842,-9.026 XT1.2 C2.1
NetC11_1: C11.1 TPS1.1 | length 1.3
  L6_SIG/PWR w0.254: C11.1 28.42,5.945 TPS1.1
NetC14_1: C14.1 VR1.4 | length 1.2
  L1_SIG/PWR w0.254: C14.1 VR1.4
NetC17_1: C17.1 R8.0 U4.1 | length 4.1
  L1_SIG/PWR w0.16: R8.0 5.948,3.955 6.202,3.701 6.569,3.701 6.807,3.463 7.96,3.463 C17.1 U4.1
NetC24_1: C24.1 R9.0 U4.2 | length 4.2
  L1_SIG/PWR w0.16: R9.0 5.693,3.1 5.927,3.334 6.483,3.334 6.854,2.963 C24.1 7.21,2.953 7.229,2.972 U4.2
NetC27_1: C27.1 R10.0 U4.3 | length 7.5
  L1_SIG/PWR w0.16: U4.3 9.184,2.462 10.61,2.462 v1(10.62,2.453)
  L6_SIG/PWR w0.16: R10.0 5.372,2.534 5.633,2.273 6.557,2.273 6.747,2.463 7.559,2.463 7.563,2.467 7.949,2.467 C27.1@7.962,2.455 ; C27.1 v1(10.62,2.453)
NetC28_1: C28.1 R13.0 U4.4 | length 6.5
  L1_SIG/PWR w0.16: U4.4 9.184,1.962 10.17,1.962 v1(10.18,1.953)
  L6_SIG/PWR w0.16: R13.0 5.35,1.674 5.615,1.939 7.196,1.939 C28.1 v1(10.18,1.953)
NetC29_0: C29.0 R12.1 U4.61 | length 7.6
  L1_SIG/PWR w0.254: C29.0 9.645,7.346 R12.1@10.399,7.346 ; U4.61 12.716,5.513 12.716,4.845 12.406,4.535 10.719,4.535 9.634,5.619 9.634,7.281 9.699,7.346 R12.1@10.399,7.346 ; R12.1@10.399,7.346 R12.1 R12.1@10.399,7.346
NetC29_1: C29.1 R11.1 R12.0 R14.0 TP4.0 | length 3.6
  L1_SIG/PWR w0.254: TP4.0 R11.1@8.887,8.35 ; R11.1 R11.1@8.887,8.35 ; R14.0 11.284,8.35 C29.1 R11.1@8.887,8.35
NetC37_1: C37.1 R15.0 U4.5 | length 4.1
  L1_SIG/PWR w0.16: R15.0 5.948,1.952 6.199,1.701 6.569,1.701 6.807,1.463 7.96,1.463 C37.1 U4.5
NetC38_1: C38.1 R17.0 U4.6 | length 4.2
  L1_SIG/PWR w0.16: R17.0 5.289,1.115 5.712,1.115 5.931,1.334 6.483,1.334 6.854,0.963 7.2,0.963 C38.1 ; C38.1@7.209,0.956 C38.1 ; U4.6 9.166,0.963 7.22,0.963 C38.1 C38.1
NetC39_1: C39.1 R18.0 U4.7 | length 7.3
  L1_SIG/PWR w0.16: U4.7 10.303,0.472 10.419,0.588 v1(10.484,0.588)
  L6_SIG/PWR w0.16: R18.0 5.372,0.543 5.633,0.282 6.548,0.282 6.557,0.273 6.747,0.463 7.954,0.463 7.964,0.453 10.284,0.453 10.419,0.588 v1(10.484,0.588)
NetC40_1: C40.1 R20.0 U4.8 | length 6.1
  L1_SIG/PWR w0.16: U4.8 9.2,-0.003 9.893,-0.003 v1(9.918,0.022)
  L6_SIG/PWR w0.16: R20.0 5.35,-0.318 5.615,-0.053 C40.1 7.278,0.022 v1(9.918,0.022)
NetC41_1: C41.1 R21.0 U4.9 | length 4.1
  L1_SIG/PWR w0.16: R21.0 5.948,-0.047 6.199,-0.298 6.568,-0.298 6.807,-0.537 7.96,-0.537 C41.1 U4.9
NetC42_1: C42.1 R22.0 U4.10 | length 4.5
  L1_SIG/PWR w0.16: R22.0 5.712,-0.894 5.94,-0.666 6.483,-0.666 6.854,-1.037 ; U4.10 9.166,-1.037 7.22,-1.037 7.21,-1.047 C42.1 ; 6.854,-1.037 C42.1 ; 6.854,-1.037 C42.1
NetC43_1: C43.1 R23.0 U4.11 | length 7.5
  L1_SIG/PWR w0.16: U4.11 9.184,-1.538 10.61,-1.538 v1(10.62,-1.547)
  L6_SIG/PWR w0.16: R23.0 5.372,-1.448 5.633,-1.709 6.539,-1.709 6.557,-1.727 6.737,-1.547 v1(10.62,-1.547)
NetC44_1: C44.1 R26.0 U4.12 | length 6.5
  L1_SIG/PWR w0.16: U4.12 9.184,-2.038 10.17,-2.038 v1(10.18,-2.047)
  L6_SIG/PWR w0.16: R26.0 5.35,-2.32 5.615,-2.055 C44.1 C44.1@7.209,-2.044 ; C44.1@7.21,-2.047 v1(10.18,-2.047)
NetC45_1: C45.1 R31.0 U4.13 | length 4.1
  L1_SIG/PWR w0.16: R31.0 5.948,-2.054 6.193,-2.299 6.569,-2.299 6.807,-2.537 C45.1@7.96,-2.537 ; C45.1@7.97,-2.547 C45.1 U4.13
NetC47_1: C47.1 U5.5 | length 1.1
  L6_SIG/PWR w0.254: U5.5 C47.1@14.963,-2.142
NetC50_1: C50.1 R32.0 U4.14 | length 4.1
  L1_SIG/PWR w0.16: R32.0 5.712,-2.895 5.941,-2.666 6.483,-2.666 6.854,-3.037 7.2,-3.037 7.21,-3.047 C50.1 9.166,-3.037 U4.14
NetC54_1: C54.1 R33.0 U4.15 | length 7.5
  L1_SIG/PWR w0.16: U4.15 9.184,-3.538 10.61,-3.538 v1(10.62,-3.547)
  L6_SIG/PWR w0.16: R33.0 5.372,-3.452 5.647,-3.727 6.557,-3.727 6.737,-3.547 C54.1 v1(10.62,-3.547)
NetC55_1: C55.1 R34.0 U4.16 | length 6.5
  L1_SIG/PWR w0.16: U4.16 9.184,-4.038 10.17,-4.038 v1(10.18,-4.047)
  L6_SIG/PWR w0.16: R34.0 5.35,-4.312 5.615,-4.047 C55.1 v1(10.18,-4.047)
NetC57_1: C57.1 U1.9 | length 0.8
  L6_SIG/PWR w0.1: U1.9@32.492,-2.189 C57.1
NetD1_1: D1.1 R4.0 | length 0.9
  L6_SIG/PWR w0.254: D1.1 R4.0
NetD3_1: D3.1 R37.0 | length 0.9
  L1_SIG/PWR w0.254: D3.1 R37.0
NetJ1_1: J1.1 R11.0 TP3.0 | length 9.2
  L1_SIG/PWR w0.254: J1.1 0.108,6.33 TP3.0 6.774,7.358 R11.0
NetL1_1: L1.1 TPS1.3
NetR2_0: R2.0 U1.16 | length 2
  L6_SIG/PWR w0.1: v1(34.766,-3.601) 34.793,-3.601 35.392,-3.002 U1.16@35.555,-3.002 ; U1.16 36.542,-3.004 R2.0
NetR3_0: R3.0 U1.15 | length 1.1
  L6_SIG/PWR w0.1: U1.15 35.504,-2.181 R3.0
NetR5_0: R5.0 R6.1 TPS1.10 | length 2.2
  L6_SIG/PWR w0.254: R5.0 28.336,2.2 29.222,2.2 R6.1 29.223,2.997 29.372,3.145 TPS1.10
NetR14_1: R14.1 U4.63 | length 2
  L1_SIG/PWR w0.254: R14.1 11.292,6.707 11.716,6.283 11.716,5.531 U4.63
NetR16_1: R16.1 U4.64 | length 1.7
  L1_SIG/PWR w0.1: v1(10.582,5.55) 11.197,5.55 U4.64
  L6_SIG/PWR w0.1: R16.1 10.324,5.55 v1(10.582,5.55)
NetR35_0: R35.0 R40.0 U1.4 | length 3.3
  L6_SIG/PWR w0.1: R35.0 R40.0 ; R40.0 U1.4@30.929,-3.502
NetU4_41: U4.41
P\D\W\N\_ADS: P1.14 R24.1 U4.35 | length 38.4
  L1_SIG/PWR w0.1: U4.35 20.782,-3.036 21.877,-3.036 v1(21.885,-3.043) 22.851,-3.043 24.211,-4.403 26.351,-4.403 34.723,-12.775 42.474,-12.775 43.736,-11.513 43.736,-5.636 P1.14
  L6_SIG/PWR w0.1: R24.1 20.34,-3.205 20.503,-3.043 v1(21.885,-3.043)
PS0_IMU1: R39.1 R42.0 U1.5 | length 1.7
  L6_SIG/PWR w0.1: R39.1 29.241,-3.002 R42.0 U1.5@30.929,-3.002
PS1_IMU1: R38.1 R41.0 U1.6 | length 1.6
  L6_SIG/PWR w0.1: U1.6@30.992,-2.189 R38.1 R41.0
R\S\T\_ADS: P1.13 R25.1 U4.36 | length 32.6
  L1_SIG/PWR w0.1: U4.36 v1(22.368,-2.528) 22.411,-2.571 22.718,-2.571 24.311,-4.163 26.681,-4.163 32.598,-10.08 42.625,-10.08 43.496,-9.209 43.496,-7.936 P1.13
  L6_SIG/PWR w0.1: R25.1 22.225,-2.385 v1(22.368,-2.528)
START_ADS: P1.12 U4.38 | length 24.2
  L1_SIG/PWR w0.1: U4.38 20.778,-1.531 22.095,-1.531 24.376,-3.812 26.881,-3.812 30.717,-7.648 40.668,-7.648 P1.12
UART1_RX_BNO2: P1.5 U1.20 | length 8.7
  L3_SIG/PWR w0.1: v1(36.234,-5.271) 36.234,-1.745 39.249,1.27 P1.5
  L6_SIG/PWR w0.1: U1.20 36.188,-5.317 v1(36.234,-5.271)
UART1_TX_BNO2: P1.4 U1.19 | length 12.4
  L3_SIG/PWR w0.1: v1(36.817,-4.504) 36.817,-1.7 38.542,0.025 39.953,0.025 40.56,0.632 40.56,2.384 39.37,3.574 P1.4
  L6_SIG/PWR w0.1: U1.19 v1(36.817,-4.504)
  L6_SIG/PWR w0.254: U1.19@35.555,-4.502 U1.19
VBAT: C9.1 C10.1 L1.2 P1.1 P1.2 TPS1.5 TPS1.6 TPS1.7 TPS1.8 | length 7
  L1_SIG/PWR w0.254: v1(34.396,3.145) 34.42,3.169 34.42,6.413 v1(34.444,6.436)
  L6_SIG/PWR w0.254: TPS1.8 TPS1.7 TPS1.6 v1(34.396,3.145)
VCAP1: C52.1 U4.28 | length 8.3
  L1_SIG/PWR w0.25: U4.28 v1(16.725,-5.113)
  L1_SIG/PWR w0.254: U4.28 16.725,-7.269 17.329,-7.874 20.641,-7.874 20.921,-7.594 C52.1
VCAP2: C53.1 U4.30 | length 1.2
  L1_SIG/PWR w0.254: U4.30@17.719,-6.084 17.725,-6.089 C53.1
VCAP3: C25.1 C26.1 U4.55 | length 2.8
  L1_SIG/PWR w0.254: U4.55 15.733,5.513 15.733,4.424 v1(15.748,4.409)
  L6_SIG/PWR w0.254: C25.1 15.36,3.663 16.114,3.663 C26.1 15.995,3.79 15.995,4.123 15.748,4.37 v1(15.748,4.409)
VCAP4: C51.1 U4.26 | length 1.2
  L1_SIG/PWR w0.254: C51.1 U4.26
VREF+: C48.1 C49.1 TP15.0 U4.24 U5.6 | length 6.5
  L1_SIG/PWR w0.25: U4.24 U4.24@14.726,-6.079
  L1_SIG/PWR w0.254: U4.24 14.725,-4.266 15.176,-3.814
  L6_SIG/PWR w0.254: U5.6 C48.1 C49.1 13.193,-4.166 14.212,-4.166 TP15.0 ; TP15.0 v1@15.176,-4.159
  other v1: 15.176,-4.159
pads on no net: P1.15 P1.16 P1.17 P1.18 U1.1 U1.7 U1.8 U1.12 U1.13 U1.17 U1.18 U1.21 U1.22 U1.23 U1.24 U2.4 U4.17 U4.18 U4.27 U4.29 U4.37 U4.60 U4.62 U5.1 U5.3 U5.7 U5.8

## Polygon pours and split planes (outlines as drawn)
VBAT on L1_SIG/PWR "VBAT_TOP" (solid, remove dead copper, pour order 3): 30.51,17 30.51,5.945 28.998,5.945 28.998,1.019 45.94,1.019 45.94,17
5V5 on L1_SIG/PWR "5V5_TOP" (solid, remove dead copper, pour order 2): 30.51,17 30.51,5.945 28.998,5.945 28.998,1.019 45.483,1.019 45.483,-17 26.534,-17 26.534,-9.521 25.053,-9.521 25.053,3.065 24.351,3.065 24.351,9.446 19.449,9.446 19.449,17
5V_A on L1_SIG/PWR "5V_A_TOP" (solid, remove dead copper, pour order 1): 16.928,9.598 19.449,9.598 19.449,17 -4.06,17 -4.06,-17 26.534,-17 26.534,-9.521 25.053,-9.521 25.053,-4.566 16.928,-4.566
3V3 on L1_SIG/PWR "3V3_TOP" (solid, remove dead copper, pour order 0): 24.351,9.446 24.351,3.065 25.046,3.065 25.046,-4.566 16.928,-4.566 16.928,9.446
5V_A on L3_SIG/PWR "5V_A_L1" (solid, remove dead copper, pour order 17): 16.928,9.446 19.435,9.446 19.435,16.468 19.435,17 -4.06,17 -4.06,-17 26.534,-17 26.534,-9.521 25.053,-9.521 25.053,-4.566 16.928,-4.566
3V3 on L3_SIG/PWR "3V3_L1" (solid, remove dead copper, pour order 16): 24.351,9.446 24.351,3.065 25.046,3.065 25.046,-4.566 16.928,-4.566 16.928,9.446
VBAT on L3_SIG/PWR "VBAT_L1" (solid, remove dead copper, pour order 15): 30.51,17 30.51,5.945 28.998,5.945 28.998,1.019 45.94,1.019 45.94,17
5V5 on L3_SIG/PWR "5V5_L1" (solid, remove dead copper, pour order 14): 30.51,17 30.51,5.945 28.998,5.945 28.998,1.019 45.94,1.019 45.94,-17 26.534,-17 26.534,-9.521 25.053,-9.521 25.053,3.065 24.351,3.065 24.351,9.446 19.47,9.446 19.47,17
VBAT on L6_SIG/PWR "VBAT_BOTTOM" (solid, remove dead copper, pour order 25): 30.51,17 30.51,5.945 28.998,5.945 28.998,1.019 45.94,1.019 45.94,17
5V_A on L6_SIG/PWR "5V_A_BOTTOM" (solid, remove dead copper, pour order 24): 16.928,9.598 19.449,9.598 19.449,17 -4.06,17 -4.06,-17 26.534,-17 26.534,-9.521 25.053,-9.521 25.053,-4.566 16.928,-4.566
5V5 on L6_SIG/PWR "5V5_BOTTOM" (solid, remove dead copper, pour order 23): 30.51,17 30.51,5.945 28.998,5.945 28.998,1.019 45.94,1.019 45.94,-17 26.534,-17 26.534,-9.521 25.053,-9.521 25.053,3.065 24.351,3.065 24.351,9.446 19.449,9.446 19.449,17
3V3 on L6_SIG/PWR "3V3_BOTTOM" (solid, remove dead copper, pour order 22): 24.351,9.446 24.351,3.065 25.046,3.065 25.046,-4.566 16.928,-4.566 16.928,9.446
GND on L4_SIG/GND "GND_L04_P029" (solid, pour order 29): -4.06,17 -4.06,-16.584 45.94,-16.584 45.94,17
3V3 on GND_P1 (split plane): 45.43,-16.49 26.759,-16.49 26.759,-9.521 26.754,-9.482 26.739,-9.446 26.715,-9.414 26.683,-9.39 26.647,-9.375 26.608,-9.37 25.138,-9.37 25.138,-4.615 25.133,-4.576 25.118,-4.54 25.094,-4.508 25.062,-4.484 25.026,-4.469 24.987,-4.464 22.427,-4.464 22.423,-4.459 22.392,-4.435 22.356,-4.42 22.316,-4.414 17.061,-4.414 17.061,1.055 17.056,1.095 17.041,1.131 17.017,1.162 16.986,1.186 16.949,1.202 16.91,1.207 16.871,1.202 16.834,1.186 16.803,1.162 16.779,1.131 16.764,1.095 16.759,1.055 16.759,-4.566 16.764,-4.605 16.779,-4.641 16.803,-4.673 16.834,-4.697 16.871,-4.712 16.91,-4.717 22.188,-4.717 22.192,-4.722 22.223,-4.746 22.26,-4.761 22.299,-4.766 24.836,-4.766 24.836,-9.521 24.841,-9.56 24.856,-9.597 24.88,-9.628 24.911,-9.652 24.948,-9.667 24.987,-9.672 26.456,-9.672 26.456,-16.49 -3.55,-16.49 -3.55,16.49 19.297,16.49 19.297,8.74 16.918,8.74 16.879,8.735 16.842,8.72 16.811,8.696 16.787,8.665 16.772,8.628 16.766,8.589 16.772,8.55 16.777,8.538 16.777,1.764 16.782,1.725 16.797,1.688 16.821,1.657 16.852,1.633 16.889,1.618 16.928,1.613 16.967,1.618 17.003,1.633 17.035,1.657 17.059,1.688 17.074,1.725 17.079,1.764 17.079,8.438 19.449,8.438 19.488,8.443 19.524,8.458 19.556,8.482 19.58,8.513 19.595,8.55 19.6,8.589 19.6,16.49 45.43,16.49
GND on GND_P2 (split plane): 45.43,-16.49 25.926,-16.49 25.926,-8.701 25.921,-8.662 25.906,-8.625 25.882,-8.594 25.85,-8.57 25.814,-8.555 25.775,-8.549 22.468,-8.549 22.468,-4.566 22.463,-4.526 22.447,-4.49 22.423,-4.459 22.392,-4.435 22.356,-4.42 22.316,-4.414 22.277,-4.42 22.241,-4.435 22.227,-4.446 22.179,-4.436 17.04,-4.436 17.04,1.055 17.03,1.105 17.002,1.147 16.96,1.175 16.91,1.185 16.86,1.175 16.818,1.147 16.79,1.105 16.781,1.055 16.781,-4.566 16.79,-4.615 16.818,-4.657 16.86,-4.685 16.91,-4.695 22.165,-4.695 22.165,-8.701 22.17,-8.74 22.185,-8.776 22.209,-8.808 22.241,-8.832 22.277,-8.847 22.316,-8.852 25.623,-8.852 25.623,-16.49 -3.55,-16.49 -3.55,16.49 19.297,16.49 19.297,8.74 16.928,8.74 16.889,8.735 16.852,8.72 16.821,8.696 16.797,8.665 16.782,8.628 16.777,8.589 16.782,8.55 16.797,8.513 16.798,8.511 16.798,1.764 16.808,1.714 16.836,1.672 16.878,1.644 16.928,1.635 16.977,1.644 17.019,1.672 17.047,1.714 17.057,1.764 17.057,8.438 19.449,8.438 19.488,8.443 19.524,8.458 19.556,8.482 19.58,8.513 19.595,8.55 19.6,8.589 19.6,16.49 45.43,16.49

## Keep-outs
Keep-Out Layer:
  the board outline again, w0.254

## Other copper
L1_SIG/PWR:
  region net 5V5: 20.843,11.142 20.843,9.641 23.34,9.641 23.34,11.148 22.746,11.148 22.746,10.592 21.438,10.592 21.438,11.142 20.845,11.142
  region net 3V3: 23.332,9.013 21.674,9.013 21.674,7.127 23.335,7.127 23.335,9.008
L6_SIG/PWR:
  region net VBAT: 37.974,12.946 40.576,12.946 40.576,7.892 37.974,7.892
  region net VBAT: 34.735,10.948 34.735,12.946 37.974,12.946 37.974,10.949
  region net VBAT: 35.903,12.946 37.974,12.946 37.974,5.645 35.903,5.645
  region net 5V5: 24.687,-6.927 24.687,-8.428 27.187,-8.428 27.187,-6.92 26.59,-6.92 26.59,-7.476 25.282,-7.476 25.282,-6.927 24.688,-6.927
  region net 5V_A: 23.631,-11.336 23.631,-10.136 23.759,-10.008 25.363,-10.008 25.363,-8.872 22.338,-8.872 22.338,-11.336 23.589,-11.336
  region net GND: 27.991,5.37 27.898,5.462 24.543,5.462 24.543,3.721 35.488,3.721 35.488,5.37 31.92,5.37
  region net VBAT: 33.165,7.153 32.258,6.246 31.599,6.246 31.599,5.645 36.115,5.645 37.663,5.645 37.663,7.153
  region net NetL1_1: 30.598,6.212 30.598,7.808 30.789,7.998 35.598,7.998 35.599,7.997 35.599,7.446 33.099,7.446 32.067,6.413 31.027,6.413 30.825,6.212
  region net 5V5: 30.348,6.209 30.348,7.108 30.348,8.847 24.53,8.847 24.53,6.444 29.898,6.444 30.133,6.209
GND_P1 (plane layer: these items are gaps in the copper):
  lines w0.254: 28.998,2.82 28.998,2.82
  lines w0.3: 16.91,1.055 16.91,-4.566 22.316,-4.566 ; 16.918,8.589 19.449,8.589 19.449,16.547 ; 16.928,1.764 16.928,8.589 ; 22.299,-4.615 24.987,-4.615 24.987,-9.521 26.608,-9.521 26.608,-16.548
GND_P2 (plane layer: these items are gaps in the copper):
  lines w0.254: 16.91,1.055 16.91,-4.566 22.179,-4.566 ; 16.928,1.764 16.928,8.589
  lines w0.3: 16.928,8.589 19.449,8.589 19.449,17 ; 22.316,-4.566 22.316,-8.701 25.775,-8.701 25.775,-16.527